# Altium PCB Motor_Drive.PcbDoc (part 1 of 2)
Units mil, origin at the board's own origin, x right, y up, seen from the top; angles counter-clockwise.
Board outline 4300 x 3900 mil, 4 copper layers (Top Layer, Power Plane, Ground Layer, Bottom Layer); 203 components, 137 nets, 620 pads, 244 vias.
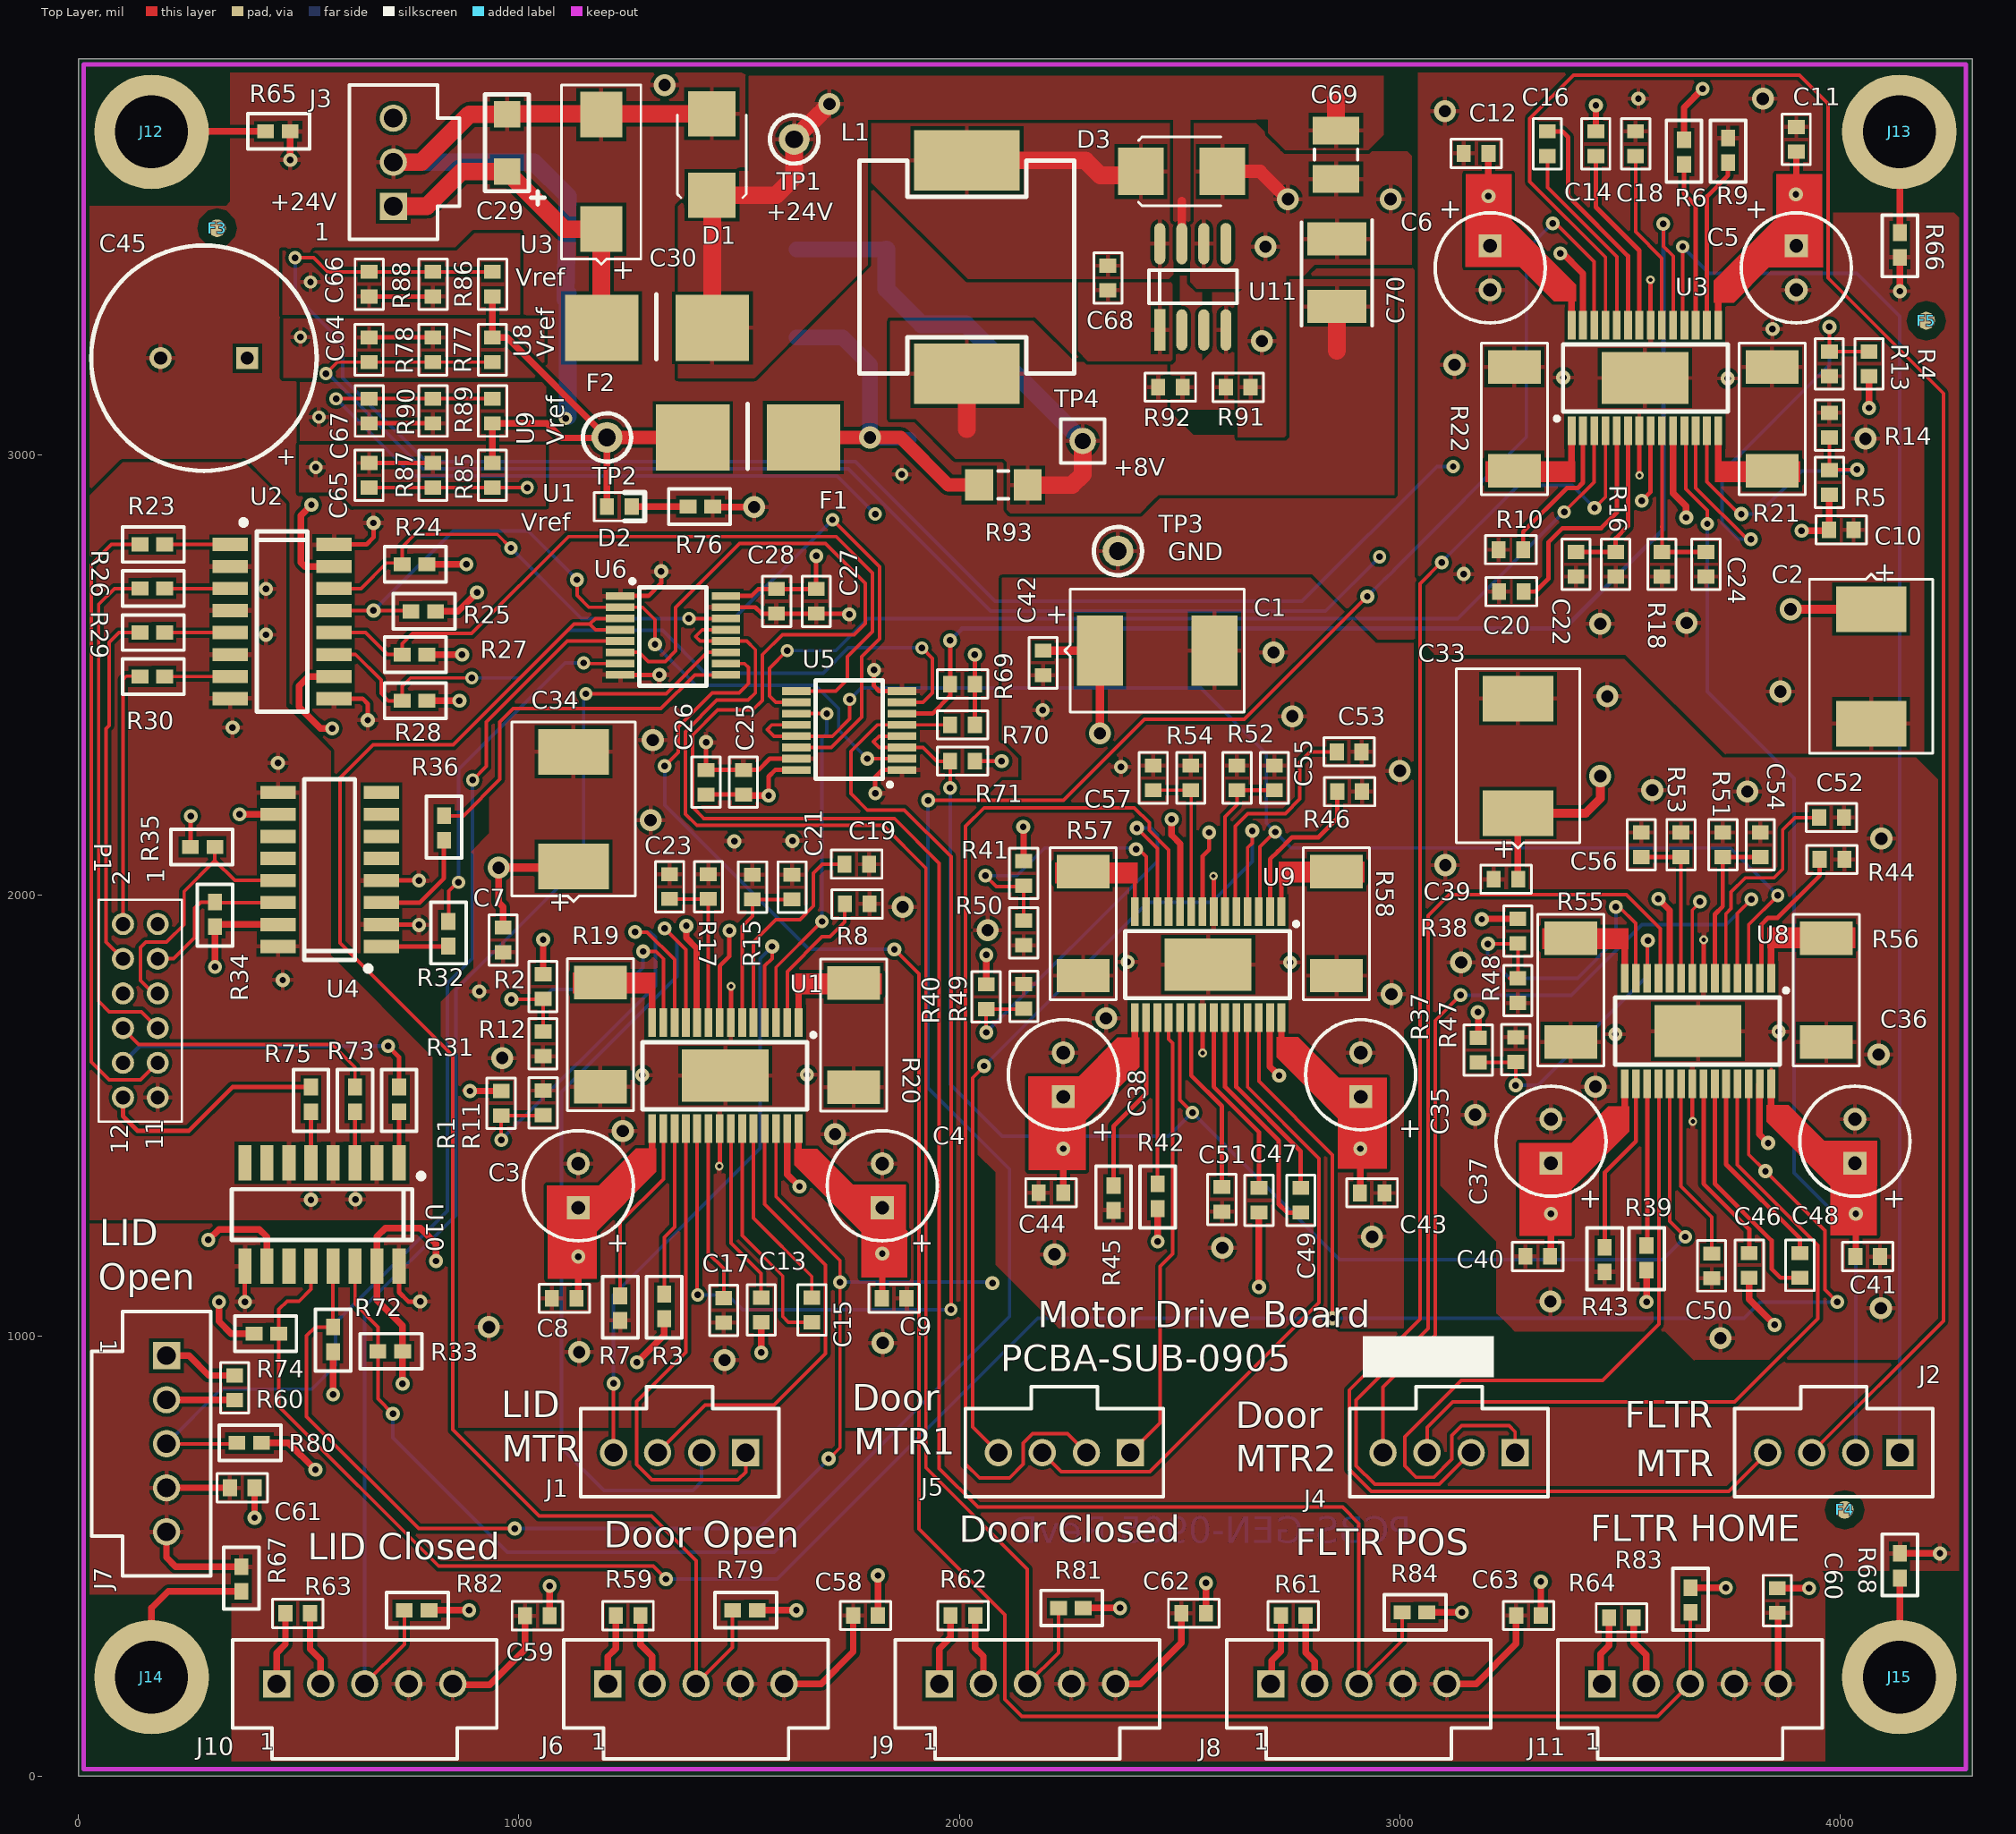
[diagram p0: Top Layer view]
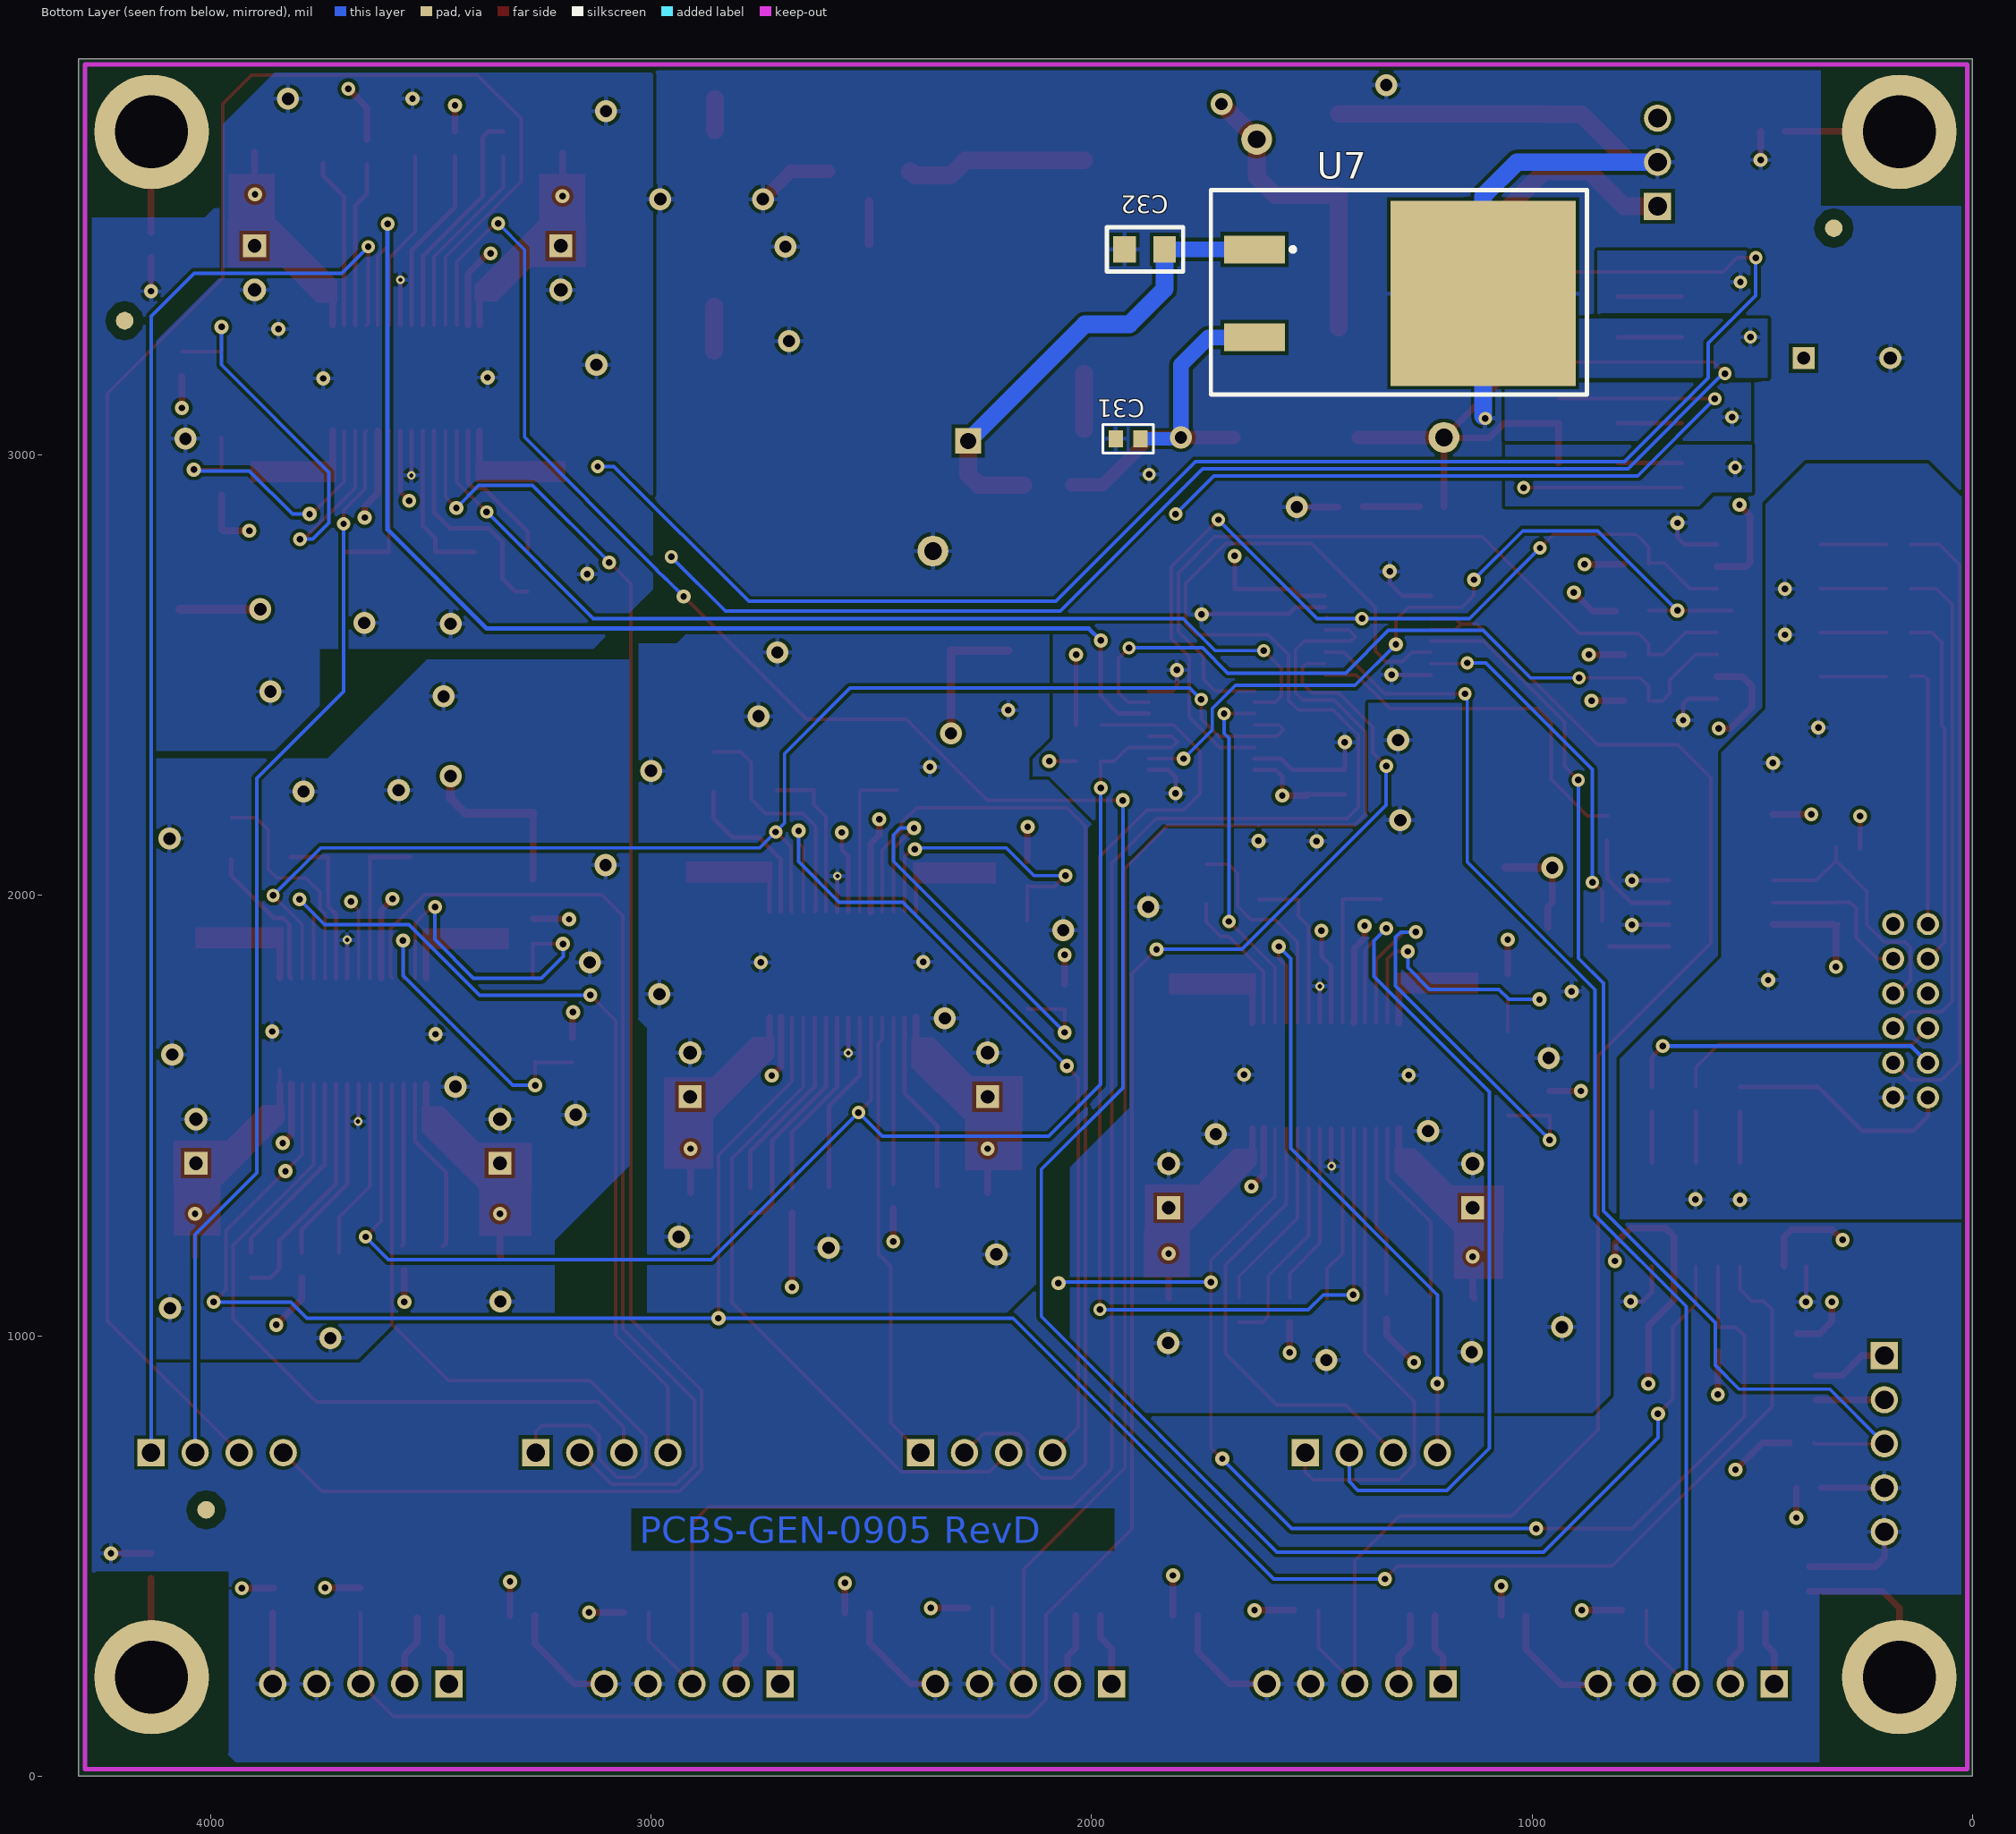
[diagram p1: Bottom Layer view, seen from below]
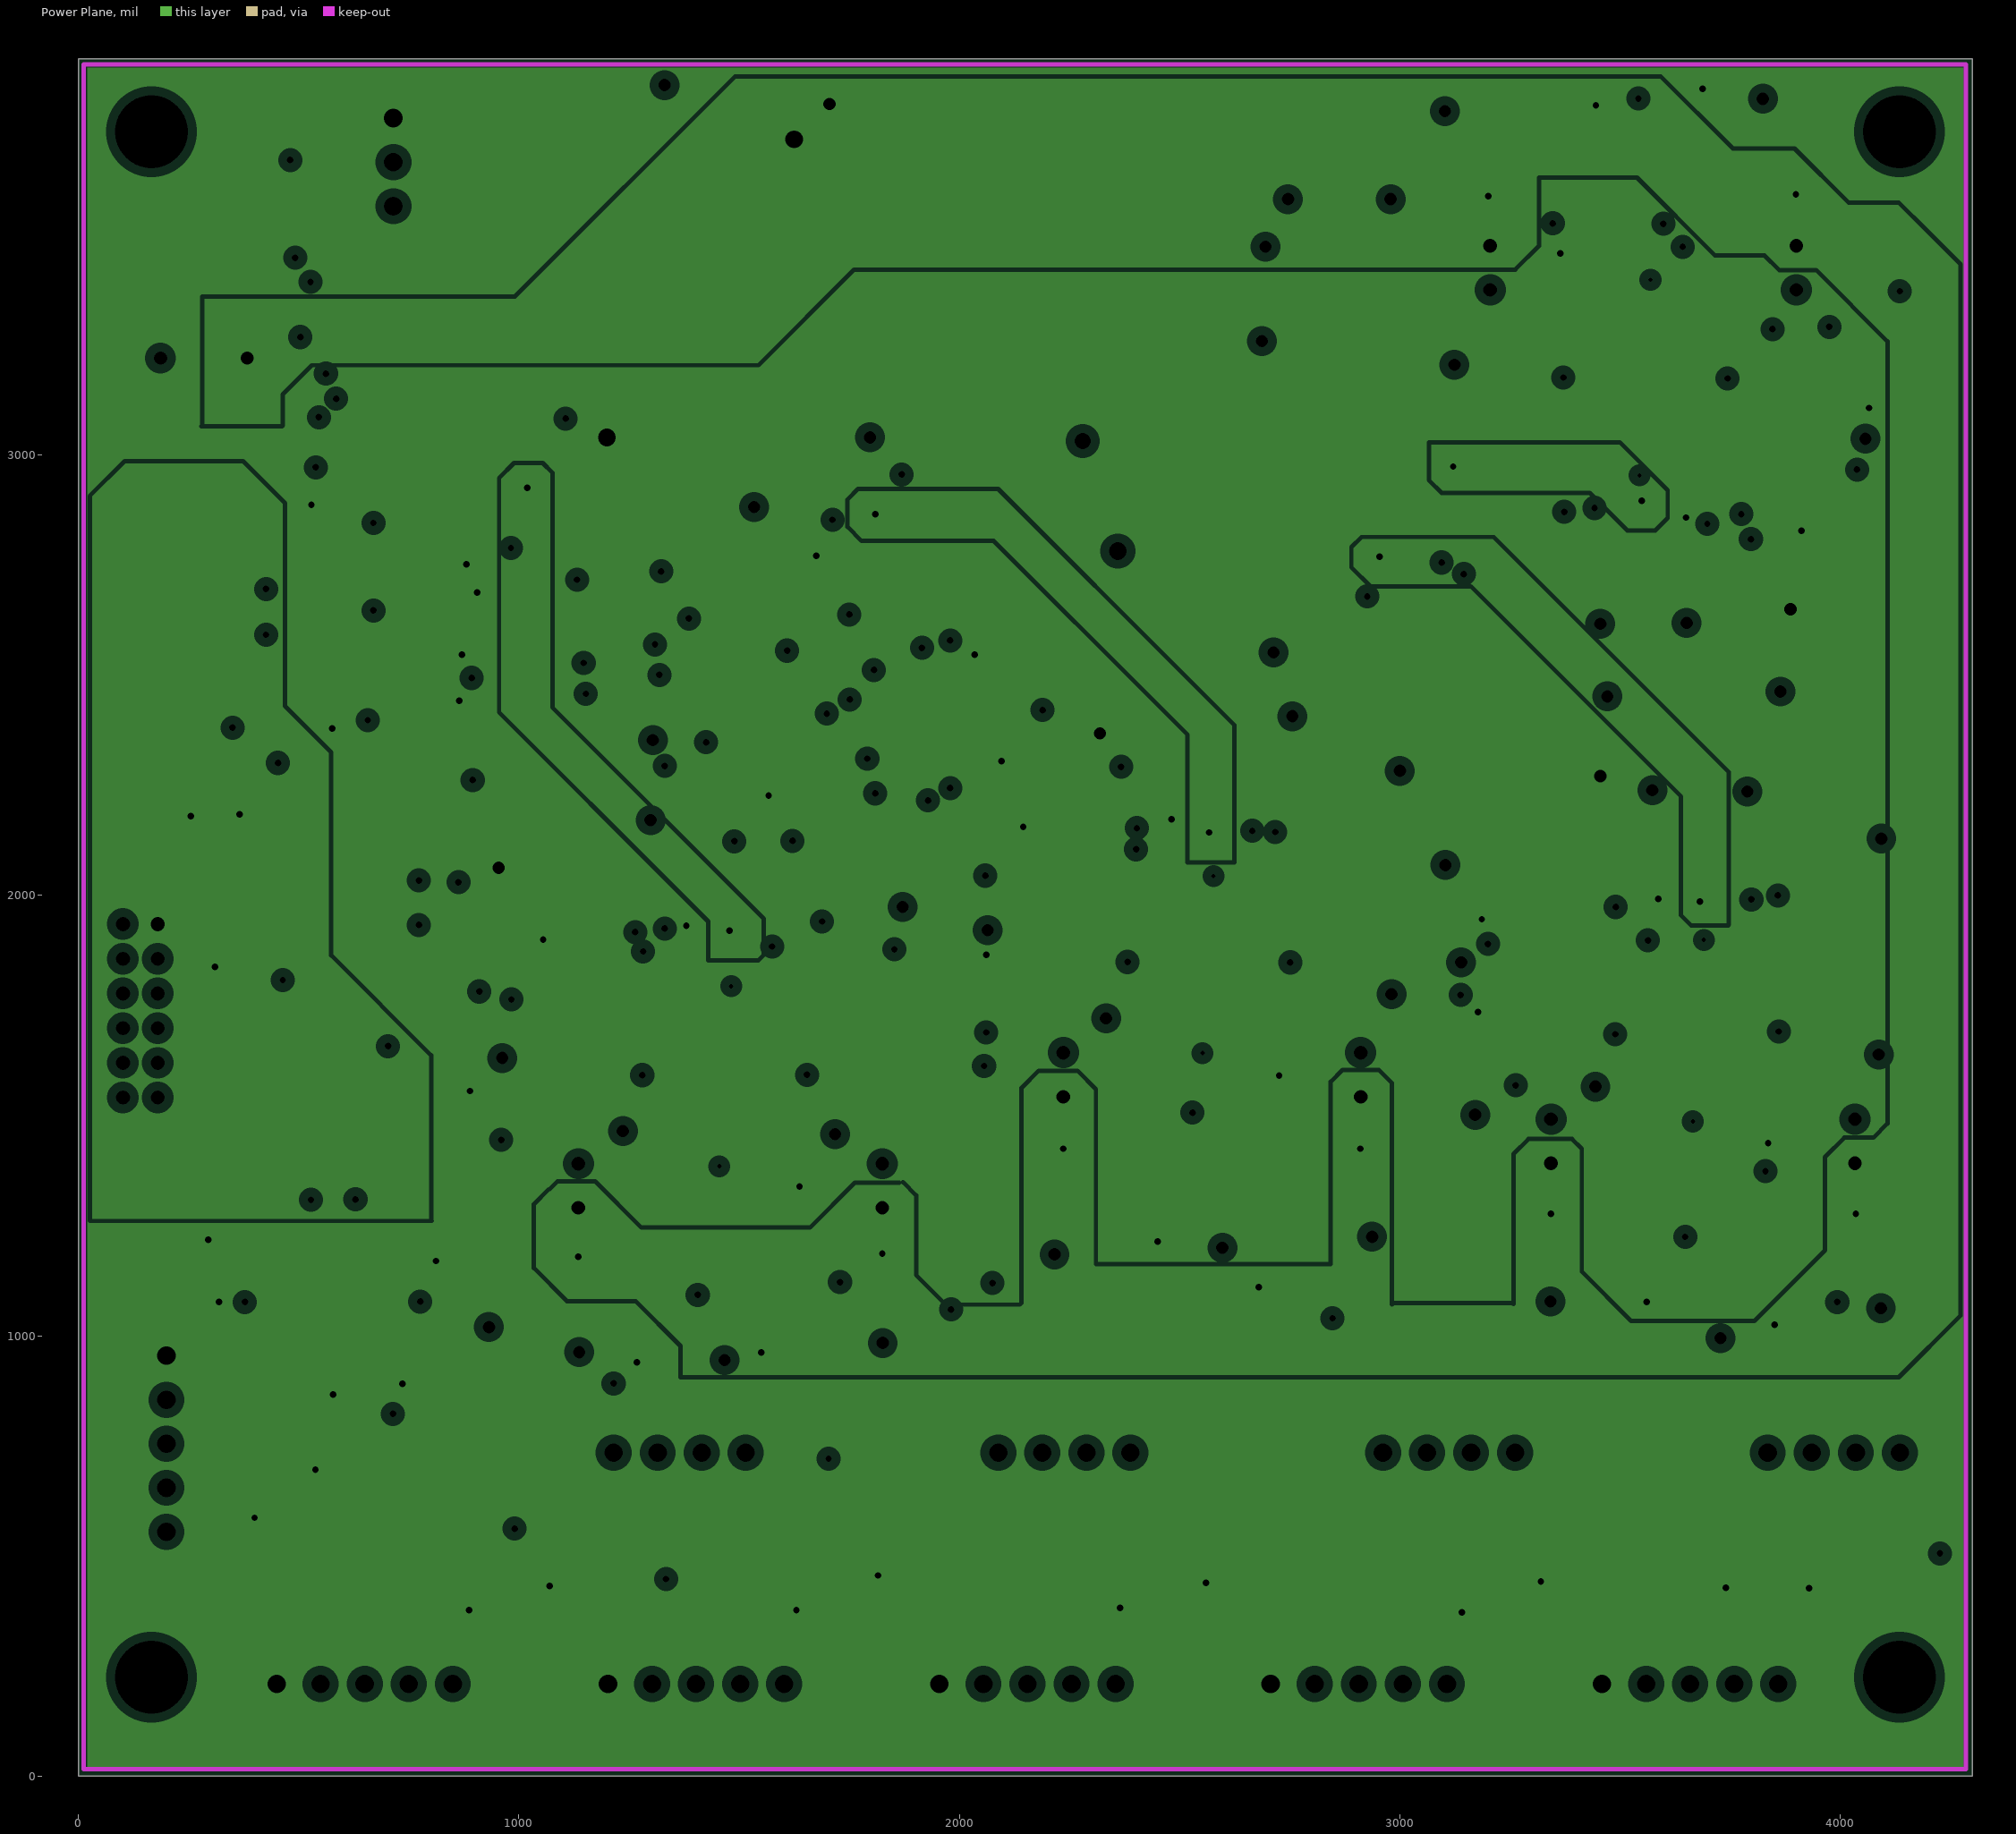
[diagram p2: Power Plane, clearances drawn from the general rule]
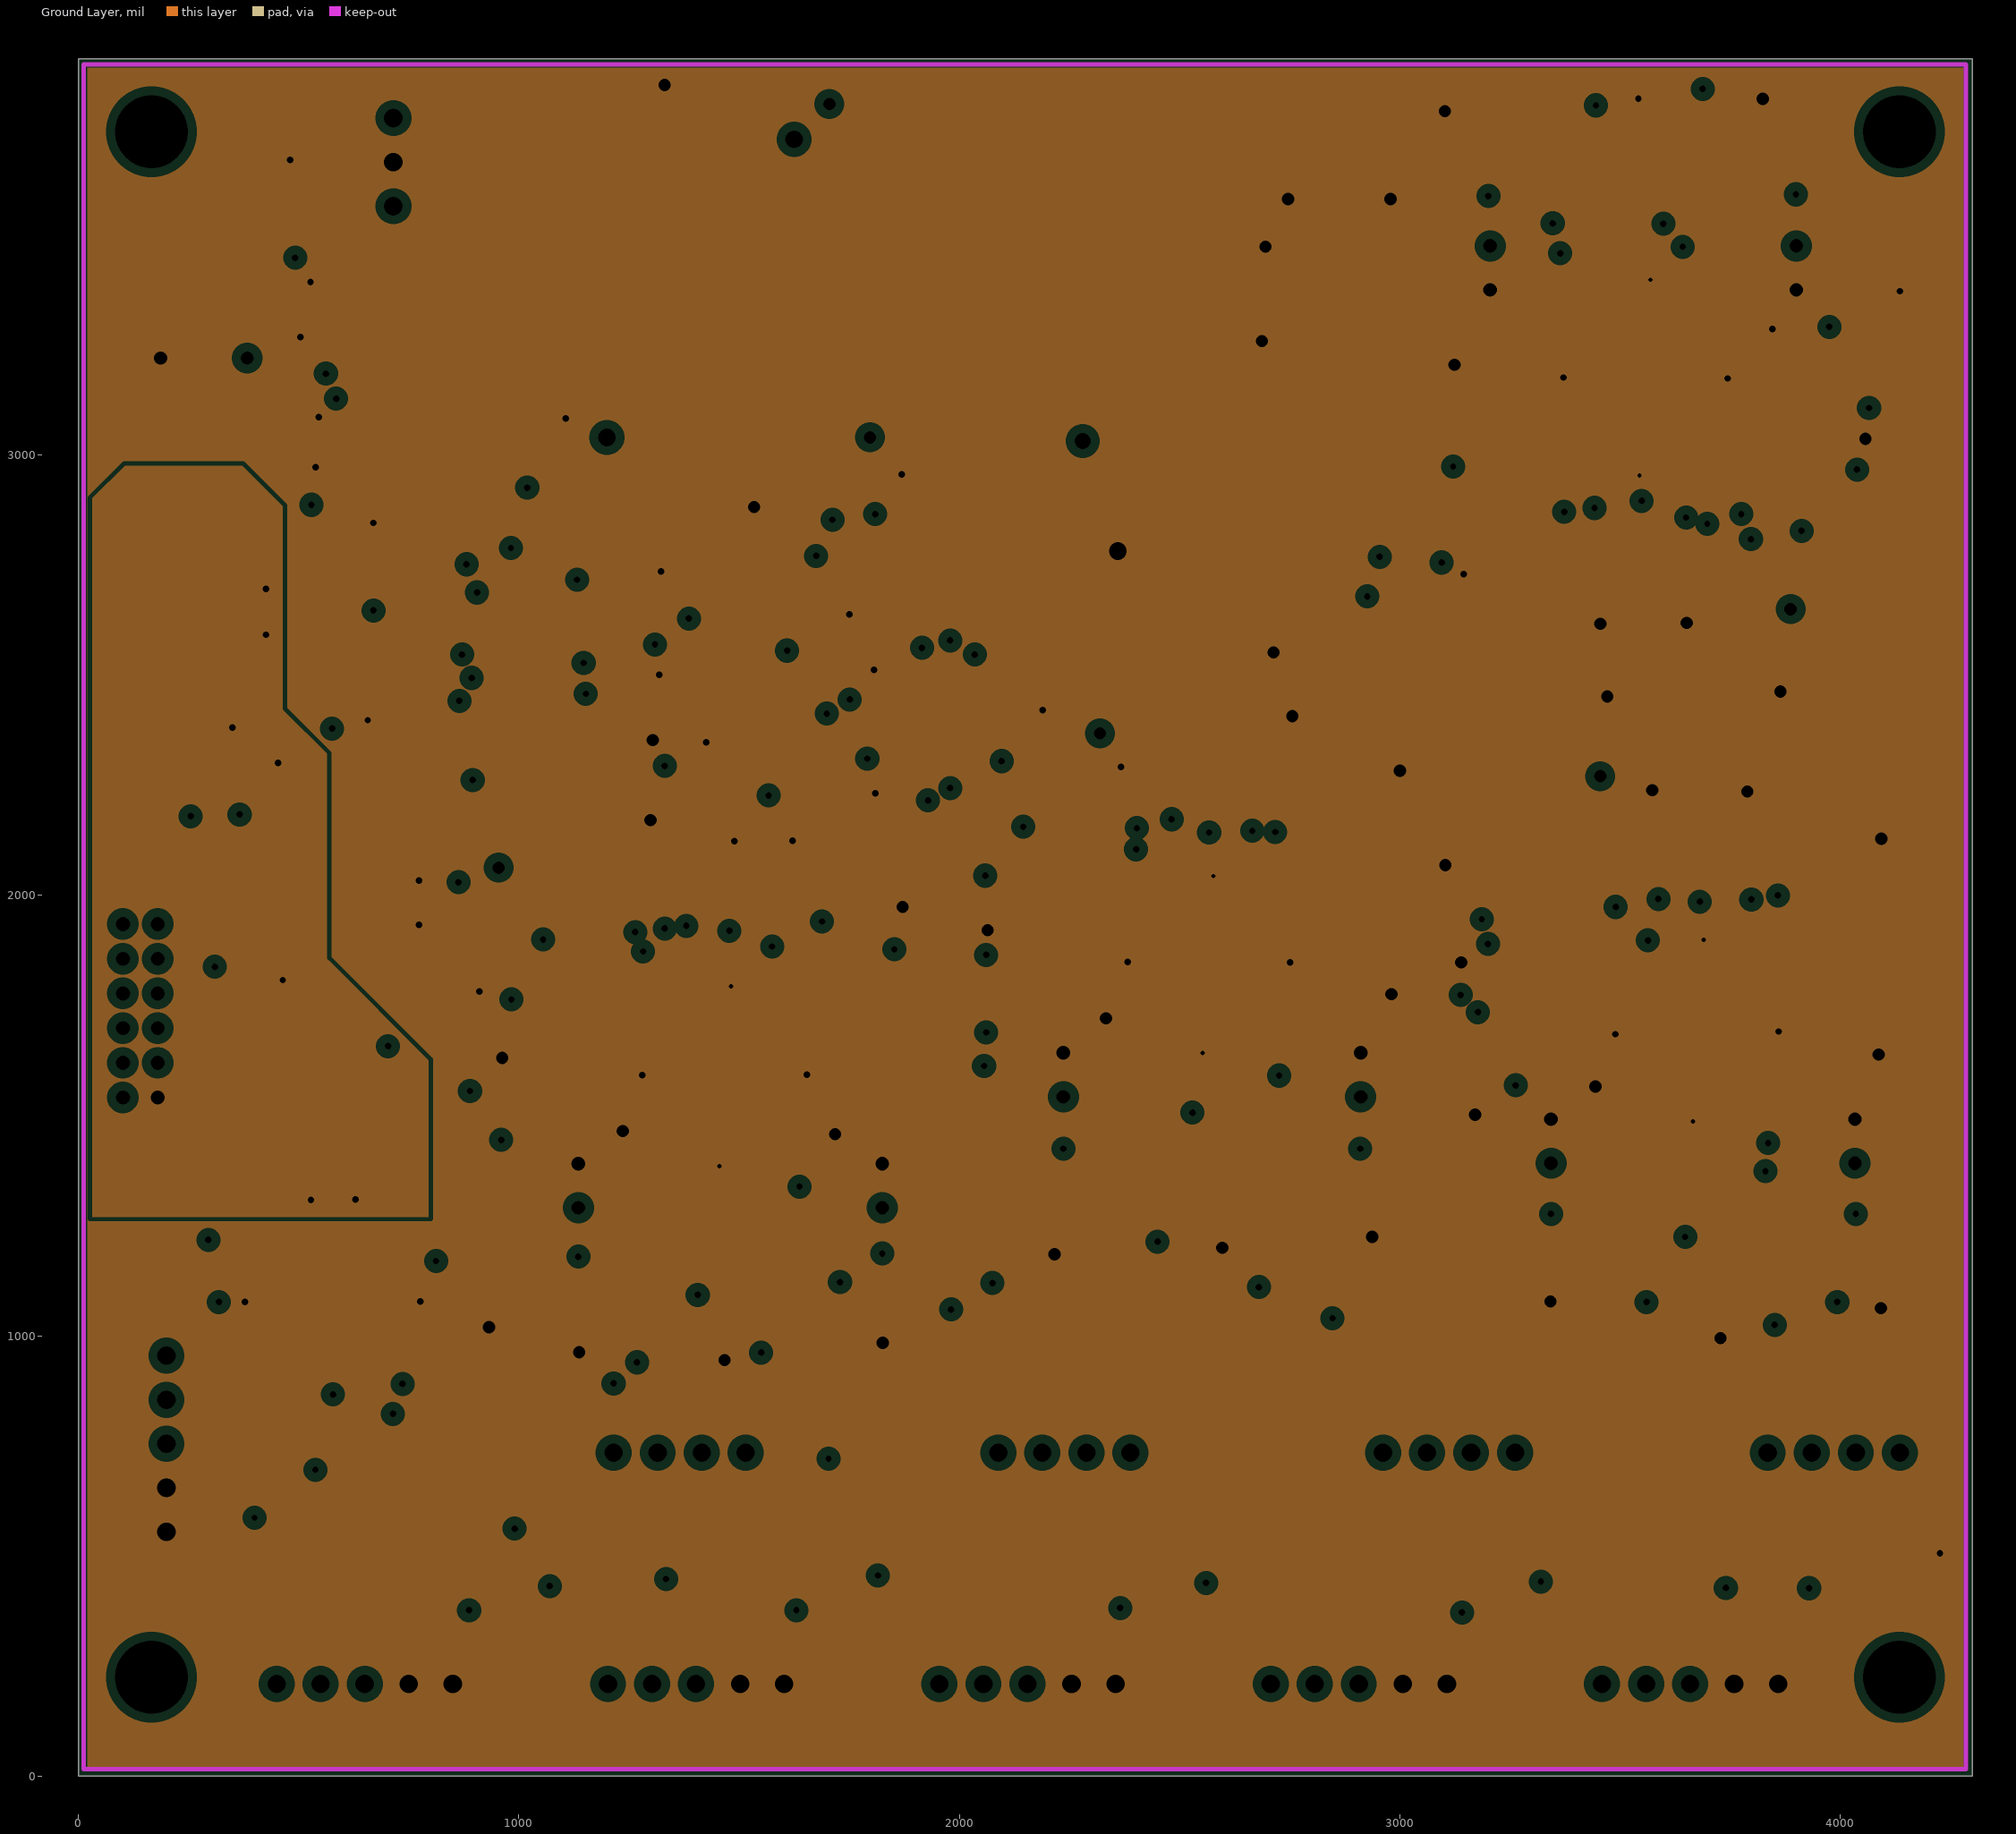
[diagram p3: Ground Layer, clearances drawn from the general rule]

## Layer stack, top to bottom
Top Layer: signal copper 1.4
Dielectric: prepreg 12.6, FR-4, Dk 4.8
Power Plane: plane copper 1.4, net (Multiple Nets)
Dielectric: core 12.6, FR-4, Dk 4.8
Ground Layer: plane copper 1.4, net (Multiple Nets)
Dielectric: prepreg 12.6, FR-4, Dk 4.8
Bottom Layer: signal copper 1.4

## Board outline
0,3900 4300,3900 4300,0 0,0

## Design rules (kind name [scope] priority, off if disabled: settings)
Clearance [All] p1: gap=8
HoleSize [All] p1: absolutevalues=TRUE maxlimit=256 minlimit=1 maxpercent=80.000 minpercent=20.000
PlaneClearance [All] p1: clearance=20
PlaneConnect PlaneConnect_1 [(InNet('+3.3'))] p1: planeconnectstyle=Relief reliefexpansion=20 reliefentries=4 reliefconductorwidth=10 reliefairgap=10
PlaneConnect [All] p2: planeconnectstyle=Relief reliefexpansion=30 reliefentries=4 reliefconductorwidth=30 reliefairgap=10
PolygonConnect PolygonConnect_1 [(InNet('+3.3'))] p1: connectstyle=Relief reliefconductorwidth=10 reliefentries=4 polygonreliefangle="90 Angle"
PolygonConnect [All] p2: connectstyle=Relief reliefconductorwidth=10 reliefentries=4 polygonreliefangle="90 Angle"
RoutingLayers [(InNet('GND_IN') OR InNet('+5V')   OR InNet('D') OR InNet('24V'))] p1: top layer_v5=FALSE bottom layer_v5=FALSE
RoutingLayers RoutingLayers_1 [All] p2: top layer_v5=TRUE bottom layer_v5=TRUE
RoutingVias [All] p1: holewidth=15 width=30 viastyle="Through Hole" minholewidth=15 minwidth=30 maxholewidth=15 maxwidth=30
SilkscreenOverComponentPads [All] p1: minsilkscreentomaskgap=10
SolderMaskExpansion [All] p1: expansion=4
TestPointUsage [All] p1: valid=0 allowmultiple=FALSE
Testpoint [All] p1: side=15 testpointundercomponent=TRUE minsize=40 maxsize=100 preferedsize=60 minholesize=0 maxholesize=40 preferedholesize=32 testpointgrid=1 style=1023 order=0123456789
Width [All] p1: maxlimit=60 minlimit=8 preferedwidth=8
19 further rules are at their usual default settings.

## Classes and differential pairs
component class "Power Motor_Drive": C29 C30 C31 C32 C68 C69 C70 D1 D2 D3 F1 F2 F3 F4 F5 J3 L1 R76 R91 R92 R93 TP1 TP2 TP3 TP4 U7 U11
component class Motor_Drive_2: C33 C34 C35 C36 C37 C38 C39 C40 C41 C42 C43 C44 C45 C46 C47 C48 C49 C50 C51 C52 C53 C54 C55 C56 C57 C58 C59 C60 C61 C62 C63 C64 C67 C? J4 J5 J6 J7 J8 J9 J10 J11 R37 R38 R39 R40 R41 R42 R43 R44 R45 R46 R47 R48 R49 R50 R51 R52 R53 R54 R55 R56 R57 R58 R59 R60 R61 R62 R63 R64 R77 R78 R79 R80 R81 R82 R83 R84 R89 R90 R? U8 U9 U?
component class Motor_Drive_1: C1 C2 C3 C4 C5 C6 C7 C8 C9 C10 C11 C12 C13 C14 C15 C16 C17 C18 C19 C20 C21 C22 C23 C24 C25 C26 C27 C28 C65 C66 C? J1 J2 J12 J13 J14 J15 P1 R1 R2 R3 R4 R5 R6 R7 R8 R9 R10 R11 R12 R13 R14 R15 R16 R17 R18 R19 R20 R21 R22 R23 R24 R25 R26 R27 R28 R29 R30 R31 R32 R33 R34 R35 R36 R65 R66 R67 R68 R69 R70 R71 R72 R73 R74 R75 R85 R86 R87 R88 R? U1 U2 U3 U4 U5 U6 U10

## Components (designator, comment, footprint, x,y, rotation, side; value= is the part's Value field where it differs from the comment)
C1 "100uF 25V" SM/CT_7360 2319,2556 r0 top
C2 "100uF 25V" SM/CT_7360 4070,2650 r270 top
C3 "56uF 50V" CPCYL/D.250/LS.100/.031 1135,1291 r90 top
C4 "56uF 50V" CPCYL/D.250/LS.100/.031 1825,1291 r90 top
C5 "56uF 50V" CPCYL/D.250/LS.100/.031 3900,3475 r270 top
C6 "56uF 50V" CPCYL/D.250/LS.100/.031 3205,3475 r270 top
C7 "0.1uF" SM/C_0603 964,1871 r90 top
C8 "0.1uF" SM/C_0603 1075,1085.5 r0 top
C9 "0.1uF" SM/C_0603 1880,1085 r180 top
C10 "0.1uF" SM/C_0603 4030,2830 r180 top
C11 "0.1uF" SM/C_0603 3900,3745 r270 top
C12 "0.1uF" SM/C_0603 3145,3685 r0 top
C13 "0.22uF 50V" SM/C_0603 1550,1031 r90 top
C14 "0.22uF 50V" SM/C_0603 3445,3735 r270 top
C15 "0.22uF 50V" SM/C_0603 1665,1031 r90 top
C16 "0.22uF 50V" SM/C_0603 3335,3735 r270 top
C17 "0.22uF 50V" SM/C_0603 1465,1086 r270 top
C18 "0.22uF 50V" SM/C_0603 3535,3679 r90 top
C19 "0.1uF" SM/C_0603 1795,2071 r180 top
C20 "0.1uF" SM/C_0603 3225,2690 r0 top
C21 "1000pF" SM/C_0603 1620,1991 r90 top
C22 "1000pF" SM/C_0603 3400,2780 r270 top
C23 "1000pF" SM/C_0603 1342,1992 r90 top
C24 "1000pF" SM/C_0603 3695,2780 r270 top
C25 "0.1uF" SM/C_0603 1510,2285 r270 top
C26 "1.0uF, 10%" SM/C_0603 1425,2285 r270 top
C27 "0.1uF" SM/C_0603 1675,2640 r90 top
C28 "1.0uF, 10%" SM/C_0603 1585,2640 r90 top
C29 "0.1uF 50V" "EIA 3216-18" 973,3644 r90 top
C30 "10uF 50V" "SM/CT 7343" 1183,3514 r90 top
C31 "0.1uF" SM/C_0603 1945,3037 r180 bottom
C32 "0.33uF" 0805 1925,3467 r180 bottom
C33 "100uF 25V" SM/CT_7360 3268,2187 r90 top
C34 "100uF 25V" SM/CT_7360 1124,2066 r90 top
C35 "56uF 50V" CPCYL/D.250/LS.100/.031 2911,1543 r90 top
C36 "56uF 50V" CPCYL/D.250/LS.100/.031 4033,1392 r90 top
C37 "56uF 50V" CPCYL/D.250/LS.100/.031 3343,1392 r90 top
C38 "56uF 50V" CPCYL/D.250/LS.100/.031 2236,1543 r90 top
C39 "0.1uF" SM/C_0603 3213,2037 r0 top
C40 "0.1uF" SM/C_0603 3285,1180.5 r0 top
C41 "0.1uF" SM/C_0603 4090,1180 r180 top
C42 "0.1uF" SM/C_0603 2190,2500 r90 top
C43 "0.1uF" SM/C_0603 2965,1324.5 r180 top
C44 "0.1uF" SM/C_0603 2180,1325 r0 top
C45 "560uF 50V" "ELECT FS RADIAL 90, 25mm length x 12.5mm diameter - vertical" 285,3220 r180 top
C46 "0.22uF 50V" SM/C_0603 3793,1132 r90 top
C47 "0.22uF 50V" SM/C_0603 2680,1280 r90 top
C48 "0.22uF 50V" SM/C_0603 3908,1132 r90 top
C49 "0.22uF 50V" SM/C_0603 2775,1280 r90 top
C50 "0.22uF 50V" SM/C_0603 3708,1187 r270 top
C51 "0.22uF 50V" SM/C_0603 2596,1338 r270 top
C52 "0.1uF" SM/C_0603 4008,2177 r180 top
C53 "0.1uF" SM/C_0603 2913,2326 r180 top
C54 "1000pF" SM/C_0603 3818,2087 r90 top
C55 "1000pF" SM/C_0603 2715,2239 r90 top
C56 "1000pF" SM/C_0603 3548,2087 r90 top
C57 "1000pF" SM/C_0603 2440,2239 r90 top
C58 "0.1uF" SM/C_0603 1815,365 r180 top
C59 "0.1uF" SM/C_0603 1070,364.5 r180 top
C60 "0.1uF" SM/C_0603 3857,427 r270 top
C61 "0.1uF" SM/C_0603 400,655 r180 top
C62 "0.1uF" SM/C_0603 2560,370 r180 top
C63 "0.1uF" SM/C_0603 3320,365 r180 top
C64 "1.0uF, 10%" SM/C_0603 660,3267 r270 top
C65 "1.0uF, 10%" SM/C_0603 660,2982 r270 top
C66 "1.0uF, 10%" SM/C_0603 660,3360 r90 top
C67 "1.0uF, 10%" SM/C_0603 660,3072 r90 top
C68 "0.01uF" SM/C_0603 2337,3374 r90 top
C69 "1uF 50V" 3225[1210] 2855,3682 r270 top
C70 "22UF 16V" 1812 2857,3414 r90 top
D1 "ES2B" SM/DO214AA_21 1438,3775 r90 top
D2 "LED" SM/D_0603 1200,2883 r0 top
D3 "ES2B" SM/DO214AA_21 2597,3644 r0 top
F1 "0.375A" "SMD - Fuse" 1395,3040 r0 top
F2 "2A" "SMD - Fuse" 1188,3289 r0 top
F3 "Fiducial" FIDUCAL 315,3515 r0 top
F4 "Fiducial" FIDUCAL 4010,605 r0 top
F5 "Fiducial" FIDUCAL 4195,3305 r0 top
J1 "CON4" MOLEX4 1515,735 r0 top
J2 "CON4" MOLEX4 4135,735 r0 top
J3 "HEADER_3X1_1" MOLEX3 715,3565 r270 top
J4 "CON4" MOLEX4 3261.67,735 r0 top
J5 "CON4" MOLEX4 2388.33,735 r0 top
J6 "DOOR_OPEN" POLCON.100/LOCKING/5 1202.25,210 r0 top
J7 "LID_OPEN" POLCON.100/LOCKING/5 200,955 r270 top
J8 "FILTER_POSITION" POLCON.100/LOCKING/5 2706.75,210 r0 top
J9 "DOOR_CLOSED" POLCON.100/LOCKING/5 1954.5,210 r0 top
J10 "LID_CLOSED" POLCON.100/LOCKING/5 450,210 r0 top
J11 "FILTER_HOME" POLCON.100/LOCKING/5 3459,210 r0 top
J12 "MOUNTING_HOLE_1" "6/32 Mounting Hole" 166,3734 r0 top
J13 "MOUNTING_HOLE_1" "6/32 Mounting Hole" 4134,3734 r0 top
J14 "MOUNTING_HOLE_1" "6/32 Mounting Hole" 166,225 r0 top
J15 "MOUNTING_HOLE_1" "6/32 Mounting Hole" 4134,225 r0 top
L1 "100uH" L/12.3MMX12.3MM/PAD_5MM 2017,3669 r270 top
P1 "HEADER_2X6_1" HEADER_2X6_1 180,1935 r90 top
R1 "Zero" SM/R_0603 960,1556 r270 top
R2 "DNP" SM/R_0603 1055,1821 r270 top
R3 "Res1" 0603 1330,1095 r270 top
R4 "Zero" SM/R_0603 4065,3179 r90 top
R5 "Zero" SM/R_0603 3975,2910 r90 top
R6 "Res1" 0603 3645,3660 r90 top
R7 "Res1" 0603 1230,1035 r90 top
R8 "10k" SM/R_0603 1740,1981 r0 top
R9 "Res1" 0603 3745,3720 r270 top
R10 "10k" SM/R_0603 3280,2785 r180 top
R11 "DNP" SM/R_0603 1055,1501 r90 top
R12 "Zero" SM/R_0603 1055,1691 r270 top
R13 "DNP" SM/R_0603 3975,3235 r270 top
R14 "DNP" SM/R_0603 3975,3040 r90 top
R15 "12.7K" SM/R_0603 1530,1991 r90 top
R16 "12.7K" SM/R_0603 3490,2780 r270 top
R17 "12.7K" SM/R_0603 1430,1992 r90 top
R18 "12.7K" SM/R_0603 3595,2780 r270 top
R19 "0.56" SM/R_2512 1185,1566 r90 top
R20 "0.56" SM/R_2512 1760,1565 r90 top
R21 "0.56" SM/R_2512 3845,3200 r270 top
R22 "0.56" SM/R_2512 3260,3200 r270 top
R23 "Res1" 0603 140,2797 r0 top
R24 "Res1" 0603 735,2752 r0 top
R25 "Res1" 0603 755,2645 r0 top
R26 "Res1" 0603 140,2697 r0 top
R27 "Res1" 0603 735,2547 r0 top
R28 "Res1" 0603 735,2442 r0 top
R29 "Res1" 0603 140,2597 r0 top
R30 "Res1" 0603 140,2497 r0 top
R31 "Res1" 0603 728,1565 r270 top
R32 "Res1" 0603 840,1885 r90 top
R33 "Res1" 0603 680,965 r0 top
R34 "Res1" 0603 310,1985 r270 top
R35 "Res1" 0603 310,2110 r180 top
R36 "Res1" 0603 830,2125 r90 top
R37 "Zero" SM/R_0603 3178,1677 r270 top
R38 "DNP" SM/R_0603 3268,1947 r270 top
R39 "Res1" 0603 3560,1205 r270 top
R40 "Zero" SM/R_0603 2061,1798 r270 top
R41 "DNP" SM/R_0603 2146,2078 r270 top
R42 "Res1" 0603 2450,1345 r270 top
R43 "Res1" 0603 3465,1145 r90 top
R44 "10k" SM/R_0603 3953,2082 r0 top
R45 "Res1" 0603 2350,1285 r90 top
R46 "10k" SM/R_0603 2858,2236 r0 top
R47 "DNP" SM/R_0603 3263,1622 r90 top
R48 "Zero" SM/R_0603 3268,1812 r270 top
R49 "DNP" SM/R_0603 2146,1743 r90 top
R50 "Zero" SM/R_0603 2146,1943 r270 top
R51 "12.7K" SM/R_0603 3733,2087 r90 top
R52 "12.7K" SM/R_0603 2630,2239 r90 top
R53 "12.7K" SM/R_0603 3638,2087 r90 top
R54 "12.7K" SM/R_0603 2525,2239 r90 top
R55 "0.56" SM/R_2512 3388,1667 r90 top
R56 "0.56" SM/R_2512 3968,1667 r90 top
R57 "0.56" SM/R_2512 2281,1818 r90 top
R58 "0.56" SM/R_2512 2856,1818 r90 top
R59 "270" SM/R_0603 1220,365 r0 top
R60 "270" SM/R_0603 355,910 r270 top
R61 "270" SM/R_0603 2730,365 r0 top
R62 "270" SM/R_0603 1980,365 r0 top
R63 "270" SM/R_0603 470,370 r0 top
R64 "270" SM/R_0603 3475,360 r0 top
R65 "Res1" 0603 425,3735 r0 top
R66 "Res1" 0603 4135,3505 r270 top
R67 "Res1" 0603 370,420 r90 top
R68 "Res1" 0603 4135,450 r90 top
R69 "10k" SM/R_0603 2035,2480 r180 top
R70 "10k" SM/R_0603 2035,2387.11 r180 top
R71 "10k" SM/R_0603 2035,2305 r180 top
R72 "Res1" 0603 578,1020 r270 top
R73 "Res1" 0603 628,1565 r270 top
R74 "Res1" 0603 455,1005 r180 top
R75 "Res1" 0603 528,1565 r270 top
R76 "Res1" 0603 1440,2883 r180 top
R77 "10K, 1%" SM/R_0603 940,3267 r270 top
R78 "8.06K, 1%" SM/R_0603 805,3267 r270 top
R79 "Res1" 0603 1485,377 r0 top
R80 "Res1" 0603 360,757 r0 top
R81 "Res1" 0603 2225,382 r0 top
R82 "Res1" 0603 740,377 r0 top
R83 "Res1" 0603 3660,372 r90 top
R84 "Res1" 0603 3005,372 r0 top
R85 "10K, 1%" SM/R_0603 940,2982 r270 top
R86 "10K, 1%" SM/R_0603 940,3360 r90 top
R87 "8.06K, 1%" SM/R_0603 805,2982 r270 top
R88 "8.06K, 1%" SM/R_0603 805,3360 r90 top
R89 "10K, 1%" SM/R_0603 940,3072 r90 top
R90 "8.06K, 1%" SM/R_0603 805,3072 r90 top
R91 "1K 1%" SM/R_0603 2605,3154 r0 top
R92 "5.62K 1%" SM/R_0603 2507,3154 r180 top
R93 "DNP" 3216[1206] 2100,2932 r180 top
TP1 "+24V" TEST_POINT_1 1625,3717 r270 top
TP2 "+5V" TEST_POINT_1 1200,3040 r180 top
TP3 "GND" TEST_POINT_1 2360,2782 r180 top
TP4 "TEST POINT" BLKCON.100/VH/TM1SQ/W.100/1 2280,3032 r0 top
U1 "STEPPER_CNTRL" 28-TSSOP_W_HEATPAD 1635,1701 r180 top
U2 "OPTO_ISO_4" SO-16_SMALL_OUTLINE 345,2797 r90 top
U3 "STEPPER_CNTRL" 28-TSSOP_W_HEATPAD 3390,3065 r0 top
U4 "OPTO_ISO_3_1DIRECTION" SO-16_SMALL_OUTLINE 688,1884 r270 top
U5 "2X4:1_MUX_1" 16-TSSOP 1860,2285 r90 top
U6 "2X4:1_MUX_1" 16-TSSOP 1240,2680 r270 top
U7 "REGULATOR_24V_5V" "D2Pak 5V reg" 1630,3467 r180 bottom
U8 "STEPPER_CNTRL" 28-TSSOP_W_HEATPAD 3843,1802 r180 top
U9 "STEPPER_CNTRL" 28-TSSOP_W_HEATPAD 2731,1953 r180 top
U10 "OPTO_ISO_3_1DIRECTION" SO-16_SMALL_OUTLINE 728,1393 r0 top
U11 "LM2675M-ADJ" SOG.050/8/WG.244/L.200 2455,3284 r0 top

## Footprints (in the part's own frame and the unit in brackets; to place one, negate y for a bottom-side part, rotate by r counter-clockwise, add the part's x,y. Pads: shape width x height; smd on the part's side, far side on the other; paste and mask are expansions set on the pad)
"6/32 Mounting Hole" [mil]
  round 260 hole 166: 1(0,0)
16-TSSOP [mm] "15-TSSOP FOOTPRINT"
  rect 0.45x1.65 smd: 1(0,-0.254) 2(0.65,-0.254) 3(1.3,-0.254) 4(1.95,-0.254) 5(2.6,-0.254) 6(3.25,-0.254) 7(3.9,-0.254) 8(4.55,-0.254) 9(4.55,5.842) 10(3.9,5.842) 11(3.25,5.842) 12(2.6,5.842) 13(1.95,5.842) 14(1.3,5.842) 15(0.65,5.842) 16(0,5.842)
  silkscreen extent -0.96,0.34 5.17,4.73
28-TSSOP_W_HEATPAD [mm] "28-TSSOP FOOTPRINT"
  rect 5x3 smd: 0(4.225,2.794)
  rect 0.45x1.65 smd: 1(0,-0.254) 2(0.65,-0.254) 3(1.3,-0.254) 4(1.95,-0.254) 5(2.6,-0.254) 6(3.25,-0.254) 7(3.9,-0.254) 8(4.55,-0.254) 9(5.2,-0.254) 10(5.85,-0.254) 11(6.5,-0.254) 12(7.15,-0.254) 13(7.8,-0.254) 14(8.45,-0.254) 15(8.45,5.842) 16(7.8,5.842) 17(7.15,5.842) 18(6.5,5.842) 19(5.85,5.842) 20(5.2,5.842) 21(4.55,5.842) 22(3.9,5.842) 23(3.25,5.842) 24(2.6,5.842) 25(1.95,5.842) 26(1.3,5.842) 27(0.65,5.842) 28(0,5.842)
  silkscreen extent -0.96,0.34 9,4.73
0603 [mil] "SMT RES/CAP/ETC"
  rect 38x32 smd: 1(0,0) 2(56,0)
  silkscreen extent -40,-40 100,40
0805 [mm] "Chip Resistor; Body 2.0 x 1.3 mm (LxW typ)"
  rect 1.3x1.5 smd: 1(0,0) 2(2.311,0)
  silkscreen extent -1.02,-1.27 3.38,1.27
1812 [mm] "Chip Capacitor; Body 4.5 x 3.2 mm (LxW typ)"
  rect 1.9x3.4 smd: 1(-1.95,0) 2(1.95,0)
  silkscreen extent -3.05,-2.03 3.05,2.03
3216[1206] [mm] "Chip Resistor; Body 3.2 x 1.6 mm (LxW typ)"
  rect 1.6x1.8 smd: 1(-1.4,0) 2(1.4,0)
  silkscreen extent -0.3,-0.8 0.3,0.8
3225[1210] [mm] "Chip Resistor; Body 3.2 x 2.5 mm (LxW typ)"
  rect 1.6x2.7 smd: 1(-1.4,0) 2(1.4,0)
  silkscreen extent -0.3,-1.25 0.3,1.25
BLKCON.100/VH/TM1SQ/W.100/1 [mil]
  round 60 / inner round 60 / far side rect 58x58 hole 37: 1(0,0)
  silkscreen extent -50,-50 50,50
CPCYL/D.250/LS.100/.031 [mil]
  round 52 / inner round 60 / far side round 52 hole 31: N(100,0)
  rect 52x52 / inner round 60 / far side rect 52x52 hole 31: P(0,0)
  silkscreen extent -75,-125 175,125
"D2Pak 5V reg" [mm]
  rect 3.5x1.6 smd: 1(0,0) 3(0,-5.08)
  rect 10.668x10.668 smd: 2(13.183,-2.54)
  silkscreen extent -2.51,-8.38 19.18,3.43
"EIA 3216-18" [mil] "CAP FOOTPRINT"
  rect 60x60 smd: 1(0,0) 2(130,0)
  silkscreen extent -75,-85 175,50
"ELECT FS RADIAL 90, 25mm length x 12.5mm diameter - vertical" [mil] "CAP ELECT FC RADIAL, 12.5mm diameter, 25mm length, 5mm lead spacing"
  rect 50x50 hole 30: 1(-98.43,0)
  round 50 hole 30: 2(98.42,0)
  silkscreen extent -256,-256 256,256
FIDUCAL [mil]
  round 40 smd: 1(0,0)
  round 40 smd far side: 1(0,0)
  Top Layer pour cut-out: -45,0 -40,20 -20,40 0,45 20,40 40,20 45,0 40,-20 20,-40 0,-45 -20,-40 -40,-20
  Bottom Layer pour cut-out: -45,0 -40,20 -20,40 0,45 20,40 40,20 45,0 40,-20 20,-40 0,-45 -20,-40 -40,-20
HEADER_2X6_1 [mm] "HIROSE DF11 2MM PITCH"
  round 1.27 hole 0.813: 1(0,0) 2(0,2) 3(-2,0) 4(-2,2) 5(-4,0) 6(-4,2) 7(-6,0) 8(-6,2) 9(-8,0) 10(-8,2) 11(-10,0) 12(-10,2)
  silkscreen extent -11.4,-1.4 1.4,3.4
L/12.3MMX12.3MM/PAD_5MM [mil]
  rect 137.8x240 smd: 1(-0.03,0) 2(484.25,0)
  silkscreen extent 0,-244 484,244
MOLEX3 [mil] "C-GRID"
  rect 62x62 hole 42: 1(0,0)
  round 62 hole 42: 2(-100,0) 3(-200,0)
  silkscreen extent -275,-100 75,150
MOLEX4 [mil]
  rect 62x62 hole 42: 1(0,0)
  round 62 hole 42: 2(-100,0) 3(-200,0) 4(-300,0)
  silkscreen extent -375,-100 75,150
POLCON.100/LOCKING/5 [mil]
  rect 62x62 / inner round 60 / far side rect 62x62 hole 42: 1(0,0)
  round 62 / inner round 60 / far side round 62 hole 42: 2(100,0) 3(200,0) 4(300,0) 5(400,0)
  silkscreen extent -100,-170 500,100
SM/C_0603 [mil]
  rect 32x38 smd: 1(0,0) 2(56,0)
  silkscreen extent -30,-32 86,32
"SM/CT 7343" [mil]
  rect 104x96 smd: N(259,-4) P(-1,-4)
  silkscreen extent -81,-94 326,86
SM/CT_7360 [mil]
  rect 104x160 smd: N(260,0) P(0,0)
  silkscreen extent -80,-140 328,140
SM/D_0603 [mil] "0603 Diode"
  rect 32x38 smd: 1(0,0) 2(56,0)
  silkscreen extent -30,-32 86,32
SM/DO214AA_21 [mil]
  rect 103x108 smd: 1(0,0) 2(-185,0)
  silkscreen extent -190,-78 -3,78
SM/R_0603 [mil]
  rect 32x38 smd: 1(0,0) 2(56,0)
  silkscreen extent -30,-33 86,32
SM/R_2512 [mil]
  rect 76x120 smd: 1(0,0) 2(236,0)
  silkscreen extent -55,-75 290,75
"SMD - Fuse" [mil]
  rect 167x150 smd: 1(0,0) 2(251,0)
  silkscreen extent 124,-71 124,76
SO-16_SMALL_OUTLINE [mil] "OPTOCOUPLER SO-16 PACKAGE"
  rect 30x80 smd: 1(0,0) 2(-50,0) 3(-100,0) 4(-150,0) 5(-200,0) 6(-250,0) 7(-300,0) 8(-350,0) 9(-350,-235) 10(-300,-235) 11(-250,-235) 12(-200,-235) 13(-150,-235) 14(-100,-235) 15(-50,-235) 16(0,-235)
  silkscreen extent -380,-175 57,-23
SOG.050/8/WG.244/L.200 [mil]
  rect 25x94 smd: 1(0,0)
  oval 25x94 smd: 2(50,0) 3(100,0) 4(150,0) 5(150,196) 6(100,196) 7(50,196) 8(0,196)
  silkscreen extent -25,60 175,136
TEST_POINT_1 [mil] "TEST POINT, PC, MINI, 0.040\" MTG HOLE"
  round 70 hole 40: 1(0,0)
  silkscreen extent -55,-55 55,55

## Part data
C1 C2 C33 C34: library part CAP_1, "CAPACITOR TANT 100UF 25V 20% SMD"
C3 C4 C5 C6 C35 C36 C37 C38: library part CAP_1, "CAP 56UF 50V ELECT FC RADIAL"
C7 C8 C9 C10 C11 C12 C13 C14 C16 C19 C20 C25 C27 C31 C39 C40 C41 C42 C43 C44 C46 C47 C48 C49 C52 C53 C58 C59 C60 C61 C62 C63: library part "CAP NP_Dup1", "CAP CER .10UF 50V X5R 0603"
C15 C17 C18 C50 C51: library part "CAP NP_1", "CAP CER .22UF 50V Y5V 0603"
C21 C22 C23 C24 C54 C55 C56 C57: library part "CAP NP_1", "CAP 1000PF 50V CERAMIC X7R 0603"
C26 C28: library part "CAP NP_Dup1"
C29 C69: library part "CAP NP_1", "CAP .1UF 50V CERM CHIP 1206 X7R"
C30: library part CAP_1, "CAP TANTALUM 10UF 50V 20% SMD"
C32: library part "CAP NP_Dup1", "CAP CER .33UF 50V X7R 0805"
C45: library part CAP, "CAP 560UF 50V ELECT FC RADIAL"
C64 C65 C66 C67: library part "CAP NP_Dup1", "CAP CER 1.0UF 10V X5R 10% 0603"
C68: library part "CAP NP_Dup1", "CAP 10000PF 50V CERM X7R 0603"
C70: library part "CAP NP_1", "CAP CER 22UF 16V X7R 20% 1812"
D1 D3: library part DIODE, "DIODE SUPER FAST REC 2A 100V SMB"
D2: "LED 565NM GRN DIFF 0603 SMD"
F1: library part "FUSE THERMAL", "FUSEBLOCK 0.5A"
F2: library part "FUSE THERMAL", "FUSEBLOCK 0.5A SLO BLO SMD"
F3 F4 F5: library part "TEST POINT"
J1 J2 J4 J5: "CONN HEADER 4POS .100 VERT GOLD"
J6 J7 J8 J9 J10 J11: library part CON5, "CONN HEADER 5POS .100 VERT GOLD"
L1: library part INDUCTOR, "POWER INDUCTOR 100UH 1.3A SMD"
R1 R2 R4 R5 R11 R12 R13 R14 R37 R38 R40 R41 R47 R48 R49 R50: library part R
R3 R6 R7 R9 R23 R24 R25 R26 R27 R28 R29 R30 R31 R32 R33 R34 R35 R36 R39 R42 R43 R45 R65 R66 R67 R68 R72 R73 R74 R75 R76 R79 R80 R81 R82 R83 R84: "Resistor"
R8 R10 R44 R46 R69 R70 R71: library part R, "RES 10K OHM 1/10W 5% 0603 SMD"
R15 R16 R17 R18 R51 R52 R53 R54: library part RESISTOR_0_Dup1, "RES 12.7K OHM 1/10W 1% 0603 SMD"
R19 R20 R21 R22 R55 R56 R57 R58: library part RESISTOR, "RES .56 OHM 1W 1% 2512 SMD"
R59 R60 R61 R62 R63 R64: library part R, "RES 270 OHM 1/10W 5% 0603 SMD"
R77 R85 R86 R89: library part Res3, "RES 10.0K OHM 1/10W 1% 0603 SMD"
R78 R87 R88 R90: library part Res3, "RES 10K OHM 1/10W .1% 0603 SMD"
R91: library part RESISTOR/SM, "RES 1.00K OHM 1/10W 1% 0603 SMD"
R92: library part RESISTOR/SM, "RES 5.62K OHM 1/10W 1% 0603 SMD"
R93: library part RESISTOR/SM, "RES ZERO OHM 1/4W 5% 1206 SMD"
TP1 TP2: library part "TEST POINT", "TEST POINT PC MINI .040\"D RED"
TP3: library part "TEST POINT", "TEST POINT PC MINI .040\"D BLACK"
TP4: "TEST POINT PC MINI .040\"D RED"
U11: library part LM2675/SO_0, "IC REG SIMPLE SWITCHER 8-SOIC"

## Via types
v1: diameter 32, hole 15, Top Layer to Bottom Layer, 136 vias
v2: diameter 50, hole 28, Top Layer to Bottom Layer, 49 vias
v3: diameter 30, hole 15, Top Layer to Bottom Layer, 25 vias
v4: diameter 32, hole 15, Top Layer to Bottom Layer, tented both sides, 15 vias
v5: diameter 30, hole 15, Top Layer to Bottom Layer, tented both sides, 10 vias
v6: diameter 20, hole 10, Top Layer to Bottom Layer, 8 vias
v7: diameter 50, hole 28, Top Layer to Bottom Layer, tented both sides, 1 vias

## Nets (pads, with @x,y where several pads share a name; then routed paths per layer and width w, separated by ;. In a path a pad name is that pad's centre, name@x,y a point inside that pad or via, vN(x,y) a via of type N, cw(c..) or ccw(c..) an arc to the next point about the centre after c; other vN are vias at no path point)
1DOOR1A: J5.4 U9.4 | length 1972.6
  Top Layer w8: v1(2056,1613) 2056,1612 2030,1586 2030,793.33 J5.4@2088.33,735 ; U9.4@2654.23,1963 2654.23,2108.23 2665,2119 v1(2665,2147)
  Bottom Layer w8: v1(2056,1613) 2428,1985 2573,1985 2665,2077 v1(2665,2147)
1DOOR1B: J5.3 U9.25 | length 1518.5
  Top Layer w8: J5.3@2188.33,735 2231.33,692 2432,692 2816,1076 2816,1403 2654.23,1564.77 U9.25@2654.23,1723
1DOOR2A: J5.2 U9.11 | length 2492.1
  Top Layer w8: J5.2@2288.33,735 2245.33,778 2166,778 2145,757 2145,709 2113,677 2046,677 2014,709 2014,2157 2056,2199 2211,2199 2397,2199 2431,2165 2431,2147.63 2475.09,2103.53 U9.11@2475.09,1963
1DOOR2B: J5.1 U9.18 | length 1031.3
  Top Layer w8: J5.1@2388.33,735 2456,802.67 2456,1158 2484,1186 2484,1665.09 2475.09,1674 U9.18@2475.09,1723
2DOOR1A: J4.4 U8.4 | length 2056.5
  Top Layer w8: J4.4@2961.67,735 2961.67,883.67 3080,1002 3080,1716 v1(3138,1774) ; U8.4@3766.23,1812 3766.23,1959.23 v1(3798,1991)
  Bottom Layer w8: v1@3136,1773 3389,1773 3550,1934 3741,1934 v1(3798,1991)
2DOOR1B: J4.3 U8.25 | length 1655.4
  Top Layer w8: J4.3@3061.67,735 3061.67,792 3119.67,850 3760,850 3949,1039 3949,1206 3766.23,1388.77 U8.25@3766.23,1572
2DOOR2A: J4.2 U8.11 | length 2317.8
  Top Layer w8: J4.2@3161.67,735 3089.67,663 2943,663 2901,705 2901,854 3064,1017 3064,1954 3112,2002 3514,2002 3591,1925 3591,1815.91 U8.11@3587.09,1812
2DOOR2B: J4.1 U8.18 | length 1688.9
  Top Layer w8: J4.1@3261.67,735 3261.67,782.33 3248,796 3140,796 3118,774 3118,720 3077,679 3037,679 3011,705 3011,771 3139,899 3460,899 3588,1027 3588,1571.09 U8.18@3587.09,1572
+5V: C1.P C2.P C7.2 C10.2 C25.2 C26.2 C27.2 C28.2 C33.P C34.P C39.2 C42.2 C58.1 C59.1 C60.1 C61.1 C62.1 C63.1 D2.1 F1.1 J3.3 J6.1 J7.1 J8.1 J9.1 J10.1 J11.1 R1.1 R2.1 R3.2 R4.1 R5.1 R6.2 R24.2 R25.2 R27.2 R28.2 R33.2 R37.1 R38.1 R39.2 R40.1 R41.1 R42.2 R59.1 R60.1 R61.1 R62.1 R63.1 R64.1 R69.1 R70.1 R71.1 R72.2 R74.2 R77.1 R79.2 R80.2 R81.2 R82.2 R83.2 R84.2 R85.1 R86.1 R89.1 TP2.1 U1.10 U1.27 U2.10 U2.15 U3.10 U3.27 U5.16 U6.16 U8.10 U8.27 U9.10 U9.27 U10.10 U10.15 | length 9447.4
  Top Layer w10: C26.2@1425,2229 C25.2@1510,2229 1538,2229 ; U6.16@1470,2680 1528,2680 1544,2696 C28.2@1585,2696 C27.2@1675,2696 v1(1675,2771) ; v1(1567,2227) 1567,2270 1582,2285 U5.16@1630,2285 ; R71.1@2035,2305 v1(2096,2305) ; R70.1@2035,2387.11 R69.1@2035,2480 v1(2035,2547)
  Top Layer w15: J7.1@200,955 251,955 296,910 R60.1@355,910 ; v1(295,1218) 319,1242 411,1242 428,1225 U10.10@428,1158 ; v1(319,1077) 319,1033 347,1005 R74.2@399,1005 ; v1(400,587) C61.1@400,655 ; R80.2@416,757 477,757 v1(538,696) ; J10.1@450,210 450,280 470,300 R63.1@470,370 ; v1(529,2887) 505,2863 505,2756 514,2747 U2.15@580,2747 ; v1(576,2379) 550,2379 501,2428 501,2476 522,2497 U2.10@580,2497 ; v1(578,867) R72.2@578,964 ; v1(736,891) R33.2@736,965 736,1023 678,1081 U10.15@678,1158 678,1226 697,1245 776,1245 812,1209 v1(812,1170) ; R28.2@791,2442 v1(865,2442) ; R27.2@791,2547 v1(871,2547) ; R24.2@791,2752 v1(881,2752) ; R82.2@796,377 v1(887,377) ; R25.2@811,2645 862,2645 v1(905,2688) ; v1@879,1557 880,1556 v1(889,1556) R1.1@960,1556 ; R85.1@940,2982 R89.1@940,3072 1064,3072 1097,3039 TP2.1@1200,3039 ; R86.1@940,3360 R77.1@940,3267 973,3267 TP2.1@1200,3040 TP2.1@1200,3039 ; v2(954,2063) 954,1984 964,1974 C7.2@964,1927 ; R2.1@1055,1821 v1(1055,1900) ; C59.1@1070,364.5 v1(1070,432) ; D2.1@1200,2883 TP2.1@1200,3039 ; J6.1@1202.25,210 1202.25,272.25 1220,290 R59.1@1220,365 R59.1@1219.5,364.5 ; v1(1268,940) 1330,1002 R3.2@1330,1039 ; v1(1380,1931) 1380,1903.58 1403.45,1880.13 1403.45,1712.23 U1.10@1404.69,1711 ; C25.2@1510,2229 1512,2227 v1(1567,2227) ; R79.2@1541,377 v1(1630,377) ; U1.27@1609.41,1471 1609.41,1366.59 v1(1637,1339) ; C58.1@1815,365 v1(1815,456) ; J9.1@1954.5,210 1954.5,289.5 1980,315 R62.1@1980,365 ; R40.1@2061,1798 v1(2061,1865) ; R41.1@2146,2078 v1@2146,2155 ; R81.2@2281,382 v1(2365,382) ; v1(2450,1214) R42.2@2450,1289 ; v1(2482,2173) 2482,2137 2501.5,2117.5 2501.5,1963.81 U9.10@2500.69,1963 ; C62.1@2560,370 v1(2560,439) ; U9.27@2705.41,1723 2704.5,1722.09 2704.5,1611.5 v1@2718,1598 ; J8.1@2706.75,210 2709,212.25 2709,263 2730,284 R61.1@2730,365 ; R84.2@3061,372 v1(3141,372) ; v1@3176,1736 3177,1736 3178,1735 R37.1@3178,1677 ; v1(3186,1946) 3187,1947 R38.1@3268,1947 ; C33.P@3268,2187 3268,2038 C39.2@3269,2037 ; C63.1@3320,365 v1(3320,442) ; v1(3364,3458) 3367,3461 3415.59,3412.41 U3.27@3415.59,3295 ; J11.1@3459,210 3456,213 3456,278 3475,297 R64.1@3475,360 ; v1(3560,1077) R39.2@3560,1149 ; v1@3585,1992 v1(3587,1992) 3612.69,1966.31 U8.10@3612.69,1812 ; U3.10@3620.31,3055 3620.31,2913.69 3650,2884 v1(3650,2858) ; R6.2@3645,3716 3645,3789 v1(3687.43,3831.43) ; R83.2@3660,428 v1(3740,428) ; U8.27@3817.41,1572 3816.5,1571.09 3816.5,1457.5 v1(3836,1438) ; C60.1@3857,427 v1(3929,427) ; v1(3912,2828) 3972,2828 C10.2@3974,2830 3975,2831 R5.1@3975,2910 ; v1(4065,3107) R4.1@4065,3179
  Top Layer w20: v2(954,2063) C34.P@1059,2064 ; C42.2@2189,2556 C42.2@2190,2556 C1.P@2319,2556 v2(2319,2368) ; C33.P@3268,2187 3422,2187 3455,2220 v2(3455,2271) ; v2(3887,2650) C2.P@4070,2650
  Top Layer w30: TP2.1@1200,3040 F1.1@1395,3040
  other v1: 2726,1591 3177,1735 2145,2156
+8V: C32.2 C70.1 L1.2 R92.2 R93.1 TP4.1 U7.1 | length 1319.7
  Top Layer w40: 2017,3059 L1.2@2017,3184.75 ; R93.1@2155.12,2932 2256,2932 2280,2956 TP4.1@2280,3032 ; 2857,3237 C70.1@2857,3337.23
  Bottom Layer w35: U7.1@1630,3467 C32.2@1834,3467
  Bottom Layer w40: C32.2@1834,3467 1834,3377 1914,3297 2015,3297 TP4.1@2280,3032
+24V: C3.P C4.P C5.P C6.P C8.2 C9.2 C11.2 C12.2 C13.1 C14.1 C35.P C36.P C37.P C38.P C40.2 C41.2 C43.2 C44.2 C45.1 C46.1 C47.1 C69.1 D1.2 F2.2 TP1.1 U1.15 U1.28 U3.15 U3.28 U8.15 U8.28 U9.15 U9.28 U11.7 | length 2659.4
  Top Layer w8: U8.28@3843,1572 3843,1605
  Top Layer w15: C8.2@1131,1085.5 1135,1089.5 v1(1135,1180) ; 1302.32,1410.32 U1.15@1302.32,1471 ; v1(1550,962) C13.1@1550,1031 ; 1635,1407 U1.28@1635,1471 ; C9.2@1824,1085 1825,1086 v1(1825,1187) ; C44.2@2236,1325 v1(2236,1425) ; 2398.32,1654.32 U9.15@2398.32,1723 ; v1(2680,1111) C47.1@2680,1280 ; 2731,1655 U9.28@2731,1723 ; C43.2@2909,1324.5 2910,1325.5 v1(2910,1425) ; v1(3201,3588) C12.2@3201,3685 ; C40.2@3341,1180.5 3343,1182.5 v1(3343,1277) ; U3.28@3390,3295 3390,3366 ; C14.1@3445,3735 v1(3445,3794) ; 3510.32,1501.32 U8.15@3510.32,1572 ; U3.15@3722.68,3295 3722.68,3370.68 ; C46.1@3793,1132 3793,1083 v1(3851,1025) ; 3843,1511 U8.28@3843,1572 ; v1(3899,3592) 3900,3593 C11.2@3900,3689 ; C41.2@4035,1181 v1(4035,1277)
  Top Layer w20: U11.7@2505,3480 2505,3576
  Top Layer w40: D1.2@1438,3590 D1.2@1440,3590 ; F2.2@1439,3289 1439,3589 D1.2@1440,3590 ; v2(1705,3797) TP1.1@1625,3717 1625,3631 1584,3590 D1.2@1440,3590 ; C69.1@2855,3737.12 2855,3808
CLOSED: R36.2 U6.9 | length 849.6
  Top Layer w8: R36.2@829,2181 874,2181 957,2264 957,2394 987,2424 1322.63,2424 1399.49,2500.87 U6.9@1470,2500.87
CLOSED_OUT: P1.5 R35.1 U4.13 | length 603.7
  Top Layer w8: P1.5@170,1777.52 141,1806.52 141,1882 153,1894 200,1894 240,1934 240,2009 310,2079 ; R35.1@310,2110 310,2079 ; U4.13@453,2034 355,2034 310,2079
D: C1.N C2.N C3.N C4.N C5.N C6.N C7.1 C8.1 C9.1 C10.1 C11.1 C12.1 C17.2 C18.2 C19.1 C20.1 C21.2 C22.2 C23.2 C24.2 C25.1 C26.1 C27.1 C28.1 C29.2 C30.N C31.1 C32.1 C33.N C34.N C35.N C36.N C37.N C38.N C39.1 C40.1 C41.1 C42.1 C43.1 C44.1 C45.2 C50.2 C51.2 C52.1 C53.1 C54.2 C55.2 C56.2 C57.2 C58.2 C59.2 C60.2 C61.2 C62.2 C63.2 C64.1 C65.1 C66.1 C67.1 C69.2 C70.2 D1.1 D3.1 J3.2 J6.4 J6.5 J7.4 J7.5 J8.4 J8.5 J9.4 J9.5 J10.4 J10.5 J11.4 J11.5 R7.1 R8.2 R9.1 R10.2 R11.2 R12.2 R13.2 R14.2 R15.2 R16.2 R17.2 R18.2 R19.1 R20.1 R21.1 R22.1 R43.1 R44.2 R45.1 R46.2 R47.2 R48.2 R49.2 R50.2 R51.2 R52.2 R53.2 R54.2 R55.1 R56.1 R57.1 R58.1 R65.2 R66.2 R67.2 R68.2 R76.1 R78.1 R87.1 R88.1 R90.1 R91.2 TP3.1 U1.0 U1.7 U1.21 U2.9 U2.16 U3.0 U3.7 U3.21 U4.2 U4.4 U5.1 U5.8 U5.15 U6.1 U6.8 U6.15 U7.2 U8.0 U8.7 U8.21 U9.0 U9.7 U9.21 U10.9 U10.16 U11.6 | length 6711.3
  Top Layer w10: v1(378,1077) U10.9@378,1158 ; U2.9@580,2447 645,2447 657,2435 v1(657,2398) ; U2.16@580,2797 654,2797 670,2813 v1(670,2846) ; C65.1@660,2982 R87.1@805,2982 ; C67.1@660,3072 R90.1@805,3072 ; C64.1@660,3267 R78.1@805,3267 ; C66.1@660,3360 R88.1@805,3360 ; U4.2@688,1934 v1@772,1934 ; U4.4@688,2034 v1(773,2034) v1@774,2035 ; U10.16@728,1158 728,1099 749,1078 v1(776,1078) ; U6.8@1230,2500.87 v4@1319,2500.87 ; U6.1@1230,2680 1294,2680 1323,2709 v1(1323,2736) ; v1(1425,2348) C26.1@1425,2285 C25.1@1510,2285 1544,2285 1569.59,2310.59 U5.15@1630,2310.59 ; v6@1455.87,1385.13 U1.21@1455.87,1471 ; U6.15@1470,2654.41 1536.59,2654.41 1551,2640 C28.1@1585,2640 C27.1@1675,2640 1748,2640 v1(1750,2638) ; U1.7@1481.46,1711 v6@1481.46,1793.46 ; v1(1806,2512) 1806,2476 1817.87,2464.13 U5.8@1870,2464.13 ; v1(1809,2232) 1809,2269 1825,2285 U5.1@1870,2285 ; v6@2551.87,1642.13 U9.21@2551.87,1723 ; U9.7@2577.46,1963 v6@2577.46,2043.54 ; U3.7@3543.54,3055 3543.54,2954.46 v6(3544,2954) ; v6(3569,3398) 3569.13,3397.87 U3.21@3569.13,3295 ; v6@3663.87,1488.13 U8.21@3663.87,1572 ; U8.7@3689.46,1812 3689.46,1898.46 v6(3690,1899)
  Top Layer w15: J7.5@200,555 200,497 221,476 R67.2@370,476 ; J7.4@200,655 C61.2@344,655 ; v1@481,3665 v1(481,3670) R65.2@481,3735 ; J10.5@850,210 852,208 934,208 1014,288 C59.2@1014,364.5 ; R76.1@1440,2882 v2(1534,2882) ; J6.5@1602.25,210 1686,210 1759,283 C58.2@1759,365 ; J9.5@2354.5,210 2411,210 2504,303 C62.2@2504,370 ; J8.5@3106.75,210 3173,210 3264,301 C63.2@3264,365 ; J11.5@3859,210 C60.2@3859,371 ; R68.2@4135,506 v1(4226,506) ; v1(4135,3372) R66.2@4135,3449
  Top Layer w30: D3.1@2597,3644 2683,3644 v7(2746,3581)
  Top Layer w40: J3.2@715,3665 779,3665 888,3774 C29.2@973,3774 ; C29.2@974,3775 1187,3775 D1.1@1438,3775
  Bottom Layer w40: J3.2@715,3665 1034,3665 1111,3588 1105.99,3367.11 U7.2@1105.69,3353.72 ; v3@1111,3088 U7.2@1111,3367
  other v1: 910,1782 773,1933 1489,2123 1621,2124 2367,2292 2189,2421 3145,2730 3846,3286 3541.43,3809.43
  other v2: 1467,945 1137,963 1826,984 3728,995 932,1020 4092,1063 3342,1078 2216,1185 2597,1200 2937,1225 1718,1458 1236,1465 3171,1502 3444,1566 962,1631 4087,1639 2333,1721 2981,1776 3139,1848 2064,1921 1871,1974 3103,2069 4093,2129 1299,2171 3789,2236 3573,2239 3000,2283 1304,2353 2756,2407 3471,2452 3864,2463 2713,2552 3455,2617 3651,2619 4057,3037 3124,3205 2687,3259 2695,3473 2979,3581 3102,3781 3824,3809 1331,3840
  other v3: 1869,2956 539,2972 1106,3083 546,3086 527,3393
  other v4: 1280,1592 1654,1593 3489,1685 3860,1691 2751,1848 2382,1849 1319,2501 3744,3174 3371,3176
  other v5: 504,3268
  other v6: 1454.87,1385.13 3665,1487 2552,1642 1482,1794 2577,2044
DIR: R27.1 U2.12 U5.9 | length 1795.6
  Top Layer w8: U2.12@580,2597 652,2597 702,2547 R27.1@735,2547 735,2572 758,2595 893,2595 1113,2815 1720,2815 1803,2732 1803,2599.36 1746,2542.36 1746,2490.83 1719.3,2464.13 U5.9@1630,2464.13
DIR_IN: P1.4 R29.1 | length 816.6
  Top Layer w8: P1.4@101.26,1856.26 63,1894.52 63,2379 70,2386 70,2575 92,2597 R29.1@140,2597
DOOR_CL: J9.3 R81.1 U6.12 U6.13 | length 3449.9
  Top Layer w8: U6.13@1470,2603.23 1416.23,2603.23 1401,2588 1411.36,2577.64 U6.12@1470,2577.64 1517.36,2577.64 1537,2558 1537,2459.89 1520.52,2443.41 1449.41,2443.41 1378,2372 1378,2185 1404,2159 1827,2159 1924,2062 1924,701 2154.5,470.5 J9.3@2154.5,210 2225,280.5 R81.1@2225,382
DOOR_DIR: U5.12 U5.13 U8.3 U9.3 | length 3141.4
  Top Layer w8: U5.12@1630,2387.36 1574.36,2387.36 1564,2377 1579.23,2361.77 U5.13@1630,2361.77 1711.77,2361.77 1751,2401 v5(1751,2445) ; U9.3@2679.82,1963 2682.23,1965.41 2682.23,2110.23 2716,2144 v3(2717,2144) ; U8.3@3791.82,1812 3791.82,1933.82 v3(3858,2000)
  Bottom Layer w8: v5(1751,2445) 1777,2471 2548,2471 2697,2322 2697,2164.37 2753.37,2108 3750,2108 v3(3858,2000)
DOOR_EN: P1.12 R75.1 | length 523.9
  Top Layer w10: P1.12@101.26,1541.3 101.26,1498.74 134,1466 251,1466 350,1565 R75.1@528,1565
DOOR_OP: J6.3 R79.1 U6.3 U6.4 | length 3602.6
  Top Layer w8: U6.4@1230,2603.23 1173.77,2603.23 1161,2616 ; U6.3@1230,2628.82 1173.82,2628.82 1161,2616 ; R79.1@1485,377 1485,292.75 J6.3@1402.25,210 1402.25,489.75 1301,591 1046,591 850,787 850,1636 594,1892 594,2267 669,2342 851.37,2342 1125.37,2616 1161,2616
DOOR_STEP: R71.2 U5.3 U5.4 U8.19 U9.19 | length 3486
  Top Layer w8: U5.4@1870,2361.77 1817.77,2361.77 1805,2349 1817.82,2336.18 U5.3@1870,2336.18 1917.82,2336.18 1949,2305 R71.2@1979,2305 v1(1979,2244) ; U9.19@2500.69,1723 2500.69,1535.31 v3(2529,1507) ; U8.19@3612.69,1572 3612.69,1260.31 v3(3648,1225)
  Bottom Layer w8: v1(1979,2244) 1979,1571 2097,1453 2475,1453 v3(2529,1507) 2863,1173 3596,1173 v3(3648,1225)
FILTER1A: J2.4 U3.4 | length 3783.2
  Top Layer w8: 3046,1424.03 3046,2708 3094,2756 v1(3095,2756) ; 3046,1427 3046,1038 2885,877 2885,697 2935,647 3747,647 J2.4@3835,735 ; v1(3442,2880) 3466.77,2904.77 U3.4@3466.77,3055
  Bottom Layer w8: v1(3095,2756) 3095,2757 3269,2931 3391,2931 v1(3442,2880)
FILTER1B: J2.3 U3.25 | length 4580.5
  Top Layer w8: U3.25@3466.77,3295 3466.77,3449.23 3295,3621 3295,3764 3394,3863 3907,3863 3972,3798 3972,3402 4234,3140 4234,1034 J2.3@3935,735
FILTER2A: J2.2 U3.11 | length 2481.2
  Top Layer w8: U3.11@3645.91,3055 3649,3051.91 3649,2923 3698,2874 v3(3698,2844)
  Bottom Layer w8: v3(3698,2844) 3698,2463 3895,2266 3895,1370 4035,1230 J2.2@4035,735
FILTER2B: J2.1 U3.18 | length 3318.1
  Top Layer w8: v3(3642,3473) 3642,3298.91 U3.18@3645.91,3295
  Bottom Layer w8: v3(3642,3473) 3702,3413 4037,3413 4135,3315 J2.1@4135,735
FILTER_DIR: U3.3 U5.10 | length 2293.5
  Top Layer w8: v3(1609,2556) 1569,2516 1569,2453 1583.46,2438.54 U5.10@1630,2438.54 ; v3(3373,2871) 3373.43,2871 3441.18,2938.76 U3.3@3441.18,3055
  Bottom Layer w8: v3(1609,2556) 1719,2556 1792,2629 3131,2629 v3(3373,2871)
FILTER_EN: P1.10 R31.1 | length 720.9
  Top Layer w10: v1(703,1658) 728,1633 R31.1@728,1565
  Bottom Layer w10: P1.10@101.26,1620.04 139.26,1658.04 v1(703,1658) v1(703,1658)
FILTER_HOME: J11.3 R83.1 U6.10 | length 4710.6
  Top Layer w8: v1(1331,2294) 1362,2325 1362,2383 1439,2460 1500,2460 1521,2481 1521,2518 1512.54,2526.46 U6.10@1470,2526.46 ; v1(1852.34,1877.66) 1908,1822 1908,562 2103,367 2103,175 2142,136 3585,136 J11.3@3659,210 3659,371 R83.1@3660,372
  Bottom Layer w8: v1(1331,2294) 1331,2205 1658.34,1877.66 v1(1852.34,1877.66)
FILTER_POS: J8.3 R84.1 U6.6 | length 5142
  Top Layer w8: U6.6@1230,2552.05 1272.95,2552.05 1294,2531 1332,2531 1356,2555 1356,2654 1501,2799 1696,2799 1786,2709 1786,2617 1761,2592 1598.21,2592 1553,2546.79 1553,2443 1531,2421 1451,2421 1394,2364 1394,2201 1420,2175 1852,2175 1954,2073 1954,699 2042,611 2870,611 2906.75,574.25 J8.3@2906.75,210 3005,308.25 R84.1@3005,372
FILTER_STEP: R69.2 U3.19 U5.6 | length 2908.2
  Top Layer w8: v1(3598,3525) 3598,3474.04 3620.31,3451.73 U3.19@3620.31,3295
  Top Layer w10: U5.6@1870,2412.95 1938.95,2412.95 1979,2453 R69.2@1979,2480 v1(1979,2579)
  Bottom Layer w10: v1(1979,2579) 2006,2606 3373,2606 3598,2831 v1(3598,3525)
GND_IN: P1.11 U2.2 U2.4 U2.6 U2.8 U4.9 U4.16 U10.2 U10.4 U10.6
  other v1: 464,1808 453,2301 350,2381
  other v4: 528,1309 629,1310 426,2592 426,2696
LID1A: J1.4 U1.4 | length 1484.1
  Top Layer w8: J1.4@1215,735 v1(1215,892) ; U1.4@1558.23,1711 1558.23,1840.23 1575,1857 v1(1575,1884)
  Bottom Layer w8: v1(1215,892) 1215,1093 1548,1426 1548,1857 v1(1575,1884) v1@1575,1890
LID1B: J1.3 U1.25 | length 1042.3
  Top Layer w8: J1.3@1315,735 1423,843 1579,843 1696,960 1696,1161 1558.23,1298.77 U1.25@1558.23,1471
LID2A: J1.2 U1.11 | length 1966.1
  Top Layer w8: v1(1331,1925) 1379.09,1876.91 U1.11@1379.09,1711
  Bottom Layer w8: v1(1331,1925) 1359,1897 1359,1816 1097,1554 1097,745 1193,649 1395,649 1415,669 J1.2@1415,735
LID2B: J1.1 U1.18 | length 1123.4
  Top Layer w8: U1.18@1379.09,1471 1379.03,1470.94 1379.03,1081.82 1379.09,1081.75 1379.09,963.09 1267,851 1267,708 1302,673 1497,673 1515,691 J1.1@1515,735
LID_CL: J10.3 R82.1 U6.11 | length 3018.9
  Top Layer w8: J10.3@650,210 740,300 R82.1@740,377 ; v3(1152,2458) 1334,2458 1428.05,2552.05 U6.11@1470,2552.05
  Bottom Layer w8: J10.3@650,210 650,1067 857,1274 857,1786 1147,2076 1147,2456 1149,2458 v3(1152,2458)
LID_DIR: U1.3 U5.11 | length 818.7
  Top Layer w8: U1.3@1583.82,1711 1583.82,1836.82 v3(1688,1941) ; U5.11@1630,2412.95 v5(1699,2412.95)
  Bottom Layer w8: v3(1688,1941) 1688,2357 1699,2368 1699,2395.9 v5(1699,2412.95)
LID_EN: P1.8 R73.1 | length 618.5
  Top Layer w8: P1.8@91.26,1698.78 99.85,1698.78 136.85,1661.78 576.22,1661.78 628,1610 R73.1@628,1565
LID_OP: J7.3 R80.1 U6.5 | length 2601.3
  Top Layer w8: J7.3@200,755 358,755 R80.1@360,757 ; v3(895.06,2262.06) 926,2293 926,2394 1109.64,2577.64 U6.5@1230,2577.64
  Bottom Layer w8: J7.3@200,755 324,879 530,879 584,933 584,1030 838,1284 838,1801 895.06,1858.06 v3(895.06,2262.06)
LID_STEP: R70.2 U1.19 U5.5 | length 2627.7
  Top Layer w8: v3@1404.69,1093 U1.19@1404.69,1471 ; R70.2@1978.75,2387.36 U5.5@1870,2387.36 1814,2387.36 1754,2327.36 1754,2231 1791,2194 1875,2194 1981,2088 v3(1981,1060)
  Bottom Layer w8: v3(1406.03,1093) 1474,1093 1508,1059 1980,1059 v3(1981,1060)
NetC13_2: C13.2 U1.22 | length 412.4
  Top Layer w8: U1.22@1481.46,1471 1481.46,1210.54 1550,1142 C13.2@1550,1087
NetC14_2: C14.2 U3.22 | length 424.8
  Top Layer w10: C14.2@3445,3679 3445,3563 3543.54,3464.46 U3.22@3543.54,3295
NetC15_1: C15.1 U1.23 | length 536.5
  Top Layer w8: U1.23@1507.05,1471 1507.05,1227.95 1599,1136 1599,1044 1612,1031 C15.1@1665,1031
NetC15_2: C15.2 U1.24 | length 438.8
  Top Layer w8: U1.24@1532.64,1471 1532.64,1267.36 1665,1135 C15.2@1665,1087
NetC16_1: C16.1 U3.23 | length 535.7
  Top Layer w10: C16.1@3335,3735 3369,3735 3382,3722 3382,3588 3517.95,3452.05 U3.23@3517.95,3295
NetC16_2: C16.2 U3.24 | length 449.2
  Top Layer w8: C16.2@3335,3679 3335,3608 3492.36,3450.64 U3.24@3492.36,3295
NetC17_1: C17.1 U1.20 | length 399.4
  Top Layer w8: U1.20@1430.28,1471 1430.28,1187.72 1465,1153 C17.1@1465,1086